# EAGLE board FULLMONI-WIDE_MAIN-Board_PCB (EAGLE 9.7.0), part 1 of 3
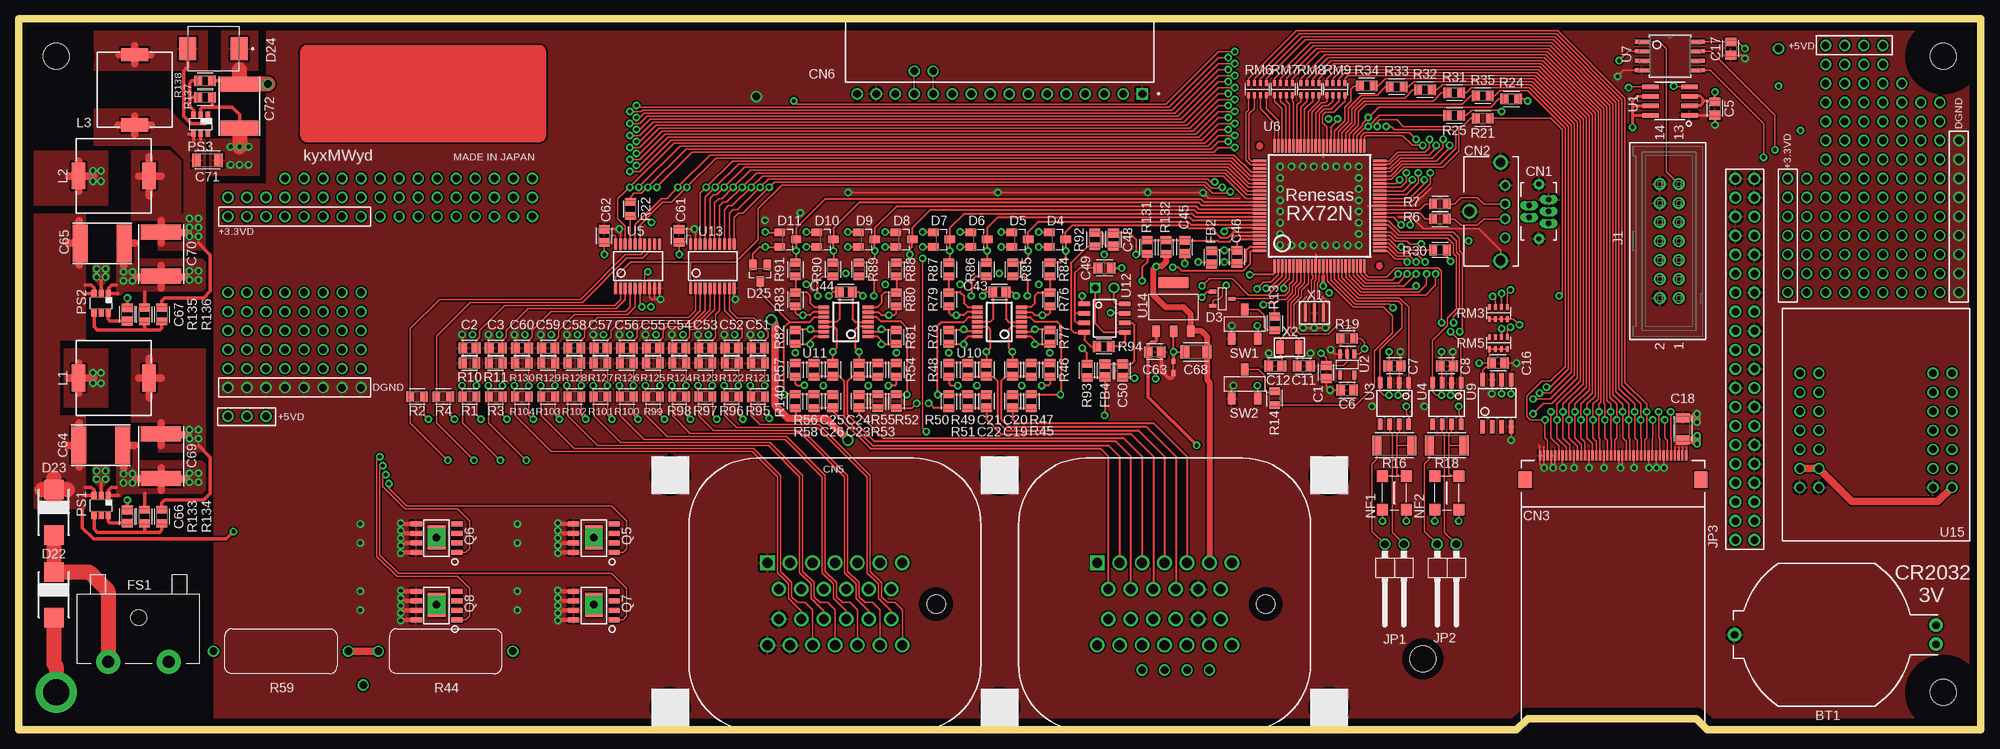
[diagram p0: board, top side]
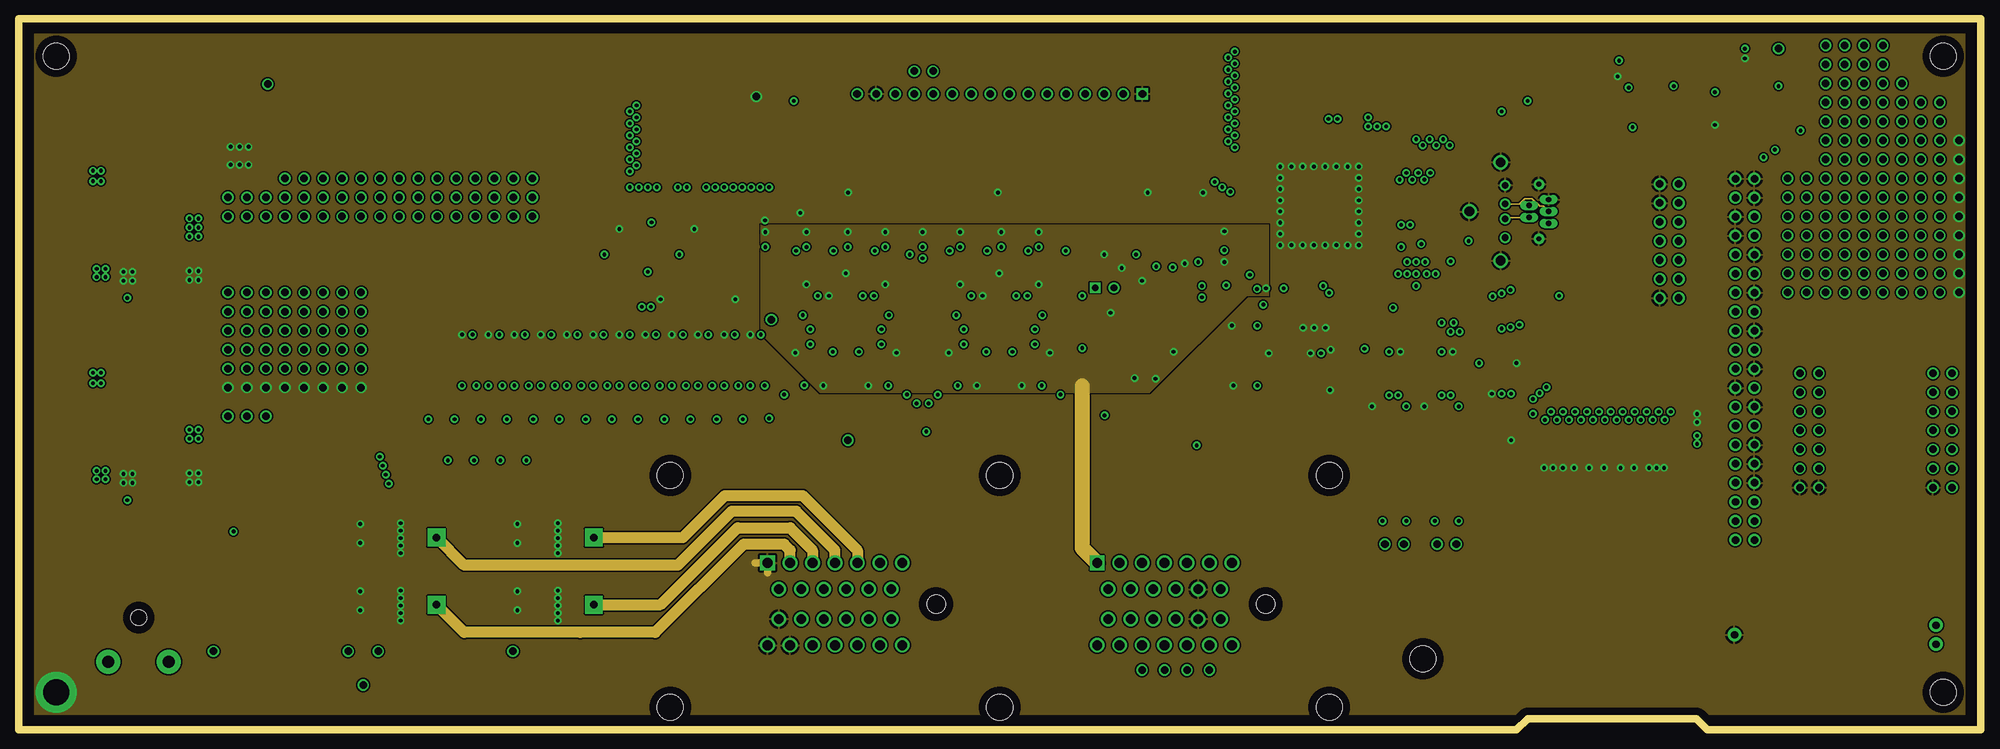
[diagram p1: board, inner layer Route2]
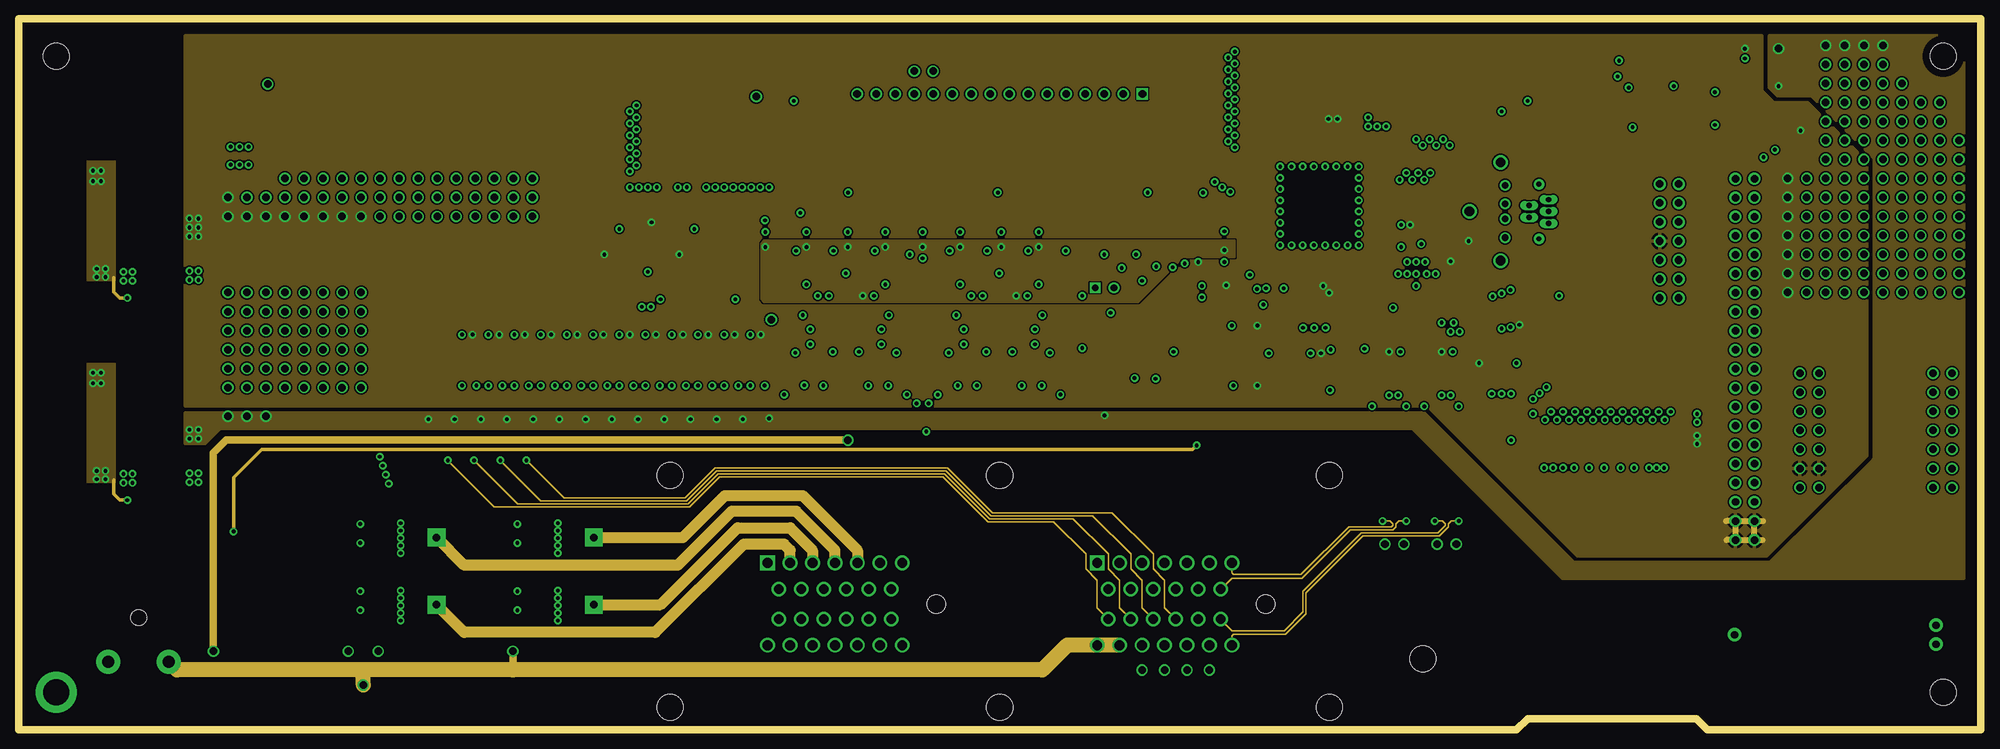
[diagram p2: board, inner layer Route15]
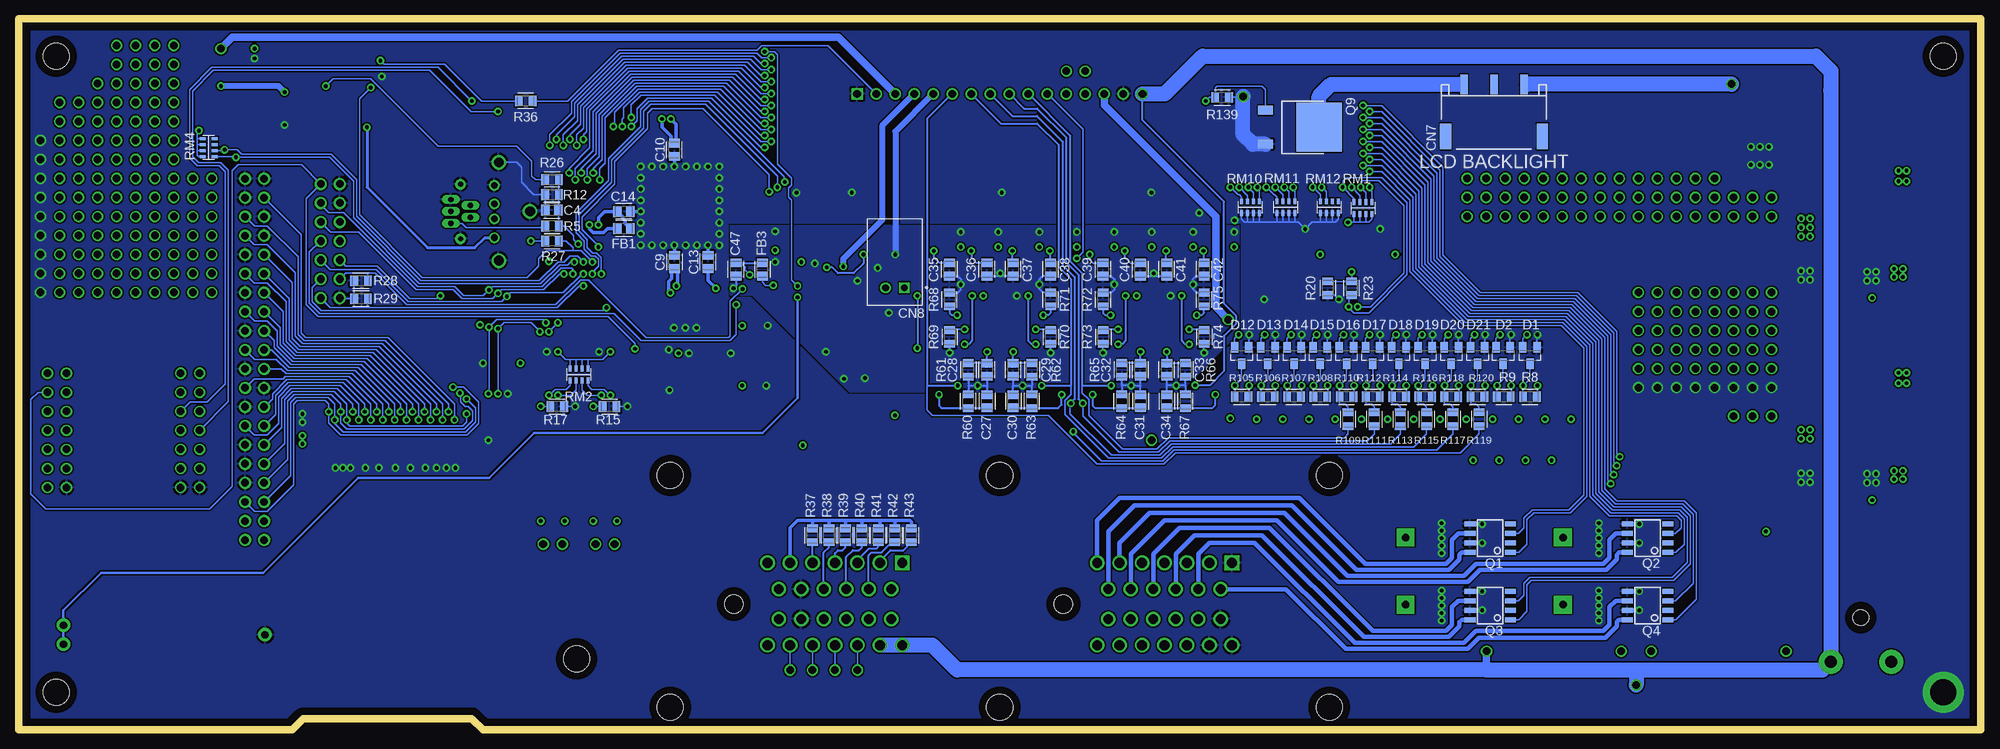
[diagram p3: board, bottom side, seen from below]

Size 262 x 95 mm. Coordinates in mm from the lower left corner, seen from the top.
Outline: 0,0 200,0 201.5,1.5 224,1.5 225.5,0 262,0 262,95 0,95 0,0
Copper layers (1+2*15+16): Top 0.035mm / dielectric 1.5mm / Route2 0.035mm / dielectric 0.15mm / Route15 0.035mm / dielectric 0.2mm / Bottom 0.035mm
Design rules "Fusion Electronics Design Rules *": minimum track width 0.2mm, minimum drill 0.5mm, track to track 0.2mm, track to pad 0.2mm, pad to pad 0.2mm, via to via 0.2mm, smd to smd 0.2mm, copper to edge 1mm, drill to drill 0.2mm, minimum pad ring 10mil, minimum via ring 0.1mm, stop-mask expansion 0.1mm, vias tented up to drill 0.51mm, thermal gap 0.3mm
Holes 3.5 mm at 257,5 257,90 131,3 5,90 131,34 87,34 175,34 87,3 175,3 187.5,9.5
tRestrict: area 0,85 to 10,95; area 252,85 to 262,95; area 252,0 to 262,10; area 84.5,31.5 to 89.5,36.5; area 128.5,31.5 to 133.5,36.5; area 128.5,0.5 to 133.5,5.5; area 172.5,31.5 to 177.5,36.5; area 172.5,0.5 to 177.5,5.5; area 84.5,0.5 to 89.5,5.5

## Footprints (pad centres in the part's own frame; a part is rotated, then mirrored left to right if it is on the bottom)
D-AGND = smd 0.7 x 0.5: 1 0,0; 2 1.5,0
120591-1 = drill 0.97 pad 1.8: 1 12.29,0; 2 -14.63,1.27; 3 -14.63,-1.27
CAPC2012X110 = smd 1.165 x 1.465: 1 -0.875,0; 2 0.875,0
CAPC3216X135 = smd 1.165 x 1.815: 1 -1.475,0; 2 1.475,0
CKG57NX5R1H226M500JH = smd 2 x 5: P$1 0,0; P$2 5.9,0
KCM55QR71E226KH01K = smd 2 x 5.4: P$1 0,0; P$2 5.9,0
500075-1517 = drill 0.7 pad 0.85 long: 1 -1.6,-1.3; 2 -0.8,1.3; 3 0,-1.3; 4 0.8,1.3; 5 1.6,-1.3 | drill 0.65 pad 1.4 slot 2.4 rotated 90: 6 -3.65,0; 7 3.65,0
105057-0001 = drill 0.9 pad 1.3: 1 0,3.5; 2 0,1; 3 0,-1; 4 0,-3.5 | drill 1.3 pad 1.9 slot 2.3: F1 0.6,6.57; F3 0.6,-6.57 | drill 1.3 pad 1.9 slot 2.3 rotated 90: F2 4.78,0
FH12A-40S-0.5SH = smd 0.3 x 1.3: 1 -9.75,0.65; 2 -9.25,0.65; 3 -8.75,0.65; 4 -8.25,0.65; 5 -7.75,0.65; 6 -7.25,0.65; 7 -6.75,0.65; 8 -6.25,0.65; 9 -5.75,0.65; 10 -5.25,0.65; 11 -4.75,0.65; 12 -4.25,0.65; 13 -3.75,0.65; 14 -3.25,0.65; 15 -2.75,0.65; 16 -2.25,0.65; 17 -1.75,0.65; 18 -1.25,0.65; 19 -0.75,0.65; 20 -0.25,0.65; 21 0.25,0.65; 22 0.75,0.65; 23 1.25,0.65; 24 1.75,0.65; 25 2.25,0.65; 26 2.75,0.65; 27 3.25,0.65; 28 3.75,0.65; 29 4.25,0.65; 30 4.75,0.65; 31 5.25,0.65; 32 5.75,0.65; 33 6.25,0.65; 34 6.75,0.65; 35 7.25,0.65; 36 7.75,0.65; 37 8.25,0.65; 38 8.75,0.65; 39 9.25,0.65; 40 9.75,0.65 | smd 1.8 x 2.2: 41 -11.715,-2.6; 42 11.715,-2.6
TE_6437288-6 = drill 1.3 square: 1 -9,5.5 | drill 1.3: 2 -6,5.5; 3 -3,5.5; 4 0,5.5; 5 3,5.5; 6 6,5.5; 7 9,5.5; 8 -7.5,2; 9 -4.5,2; 10 -1.5,2; 11 1.5,2; 12 4.5,2; 13 7.5,2; 14 -7.5,-2; 15 -4.5,-2; 16 -1.5,-2; 17 1.5,-2; 18 4.5,-2; 19 7.5,-2; 20 -9,-5.5; 21 -6,-5.5; 22 -3,-5.5; 23 0,-5.5; 24 3,-5.5; 25 6,-5.5; 26 9,-5.5 | hole 2.5: 13.5,0
TE_6473418-2 = drill 1.3 square: 1 -9,5.5 | drill 1.3: 2 -6,5.5; 3 -3,5.5; 4 0,5.5; 5 3,5.5; 6 6,5.5; 7 9,5.5; 8 -7.5,2; 9 -4.5,2; 10 -1.5,2; 11 1.5,2; 12 4.5,2; 13 7.5,2; 14 -7.5,-2; 15 -4.5,-2; 16 -1.5,-2; 17 1.5,-2; 18 4.5,-2; 19 7.5,-2; 20 -9,-5.5; 21 -6,-5.5; 22 -3,-5.5; 23 0,-5.5; 24 3,-5.5; 25 6,-5.5; 26 9,-5.5 | hole 2.5: 13.5,0
SAMTEC_SSQ-116-02-G-S-RA = drill 1.02 pad 1.37 square: 01 19.05,-5.775 | drill 1.02 pad 1.37: 02 16.51,-5.775; 03 13.97,-5.775; 04 11.43,-5.775; 05 8.89,-5.775; 06 6.35,-5.775; 07 3.81,-5.775; 08 1.27,-5.775; 09 -1.27,-5.775; 10 -3.81,-5.775; 11 -6.35,-5.775; 12 -8.89,-5.775; 13 -11.43,-5.775; 14 -13.97,-5.775; 15 -16.51,-5.775; 16 -19.05,-5.775
SM03-4.0-B-BHS-1-TB = smd 2.6 x 1: 1 8.65,4; 2 8.65,0; 3 8.65,-4 | smd 3.4 x 1.5: 4 1.7,6.45; 5 1.7,-6.45
HDR-02/RA = drill 0.9 square: 1 -1.25,0 | drill 0.9: 2 1.25,0
SOT23 = smd 1 x 1.4: 1 -0.95,-1.1; 2 0.95,-1.1; 3 0,1.1
1SS321 = smd 1 x 0.5: 1 -1.25,0.95; 2 -1.25,-0.95; 3 1.25,0
DAM3MA27 = smd 2.6 x 2.6: P$1 0,0; P$2 6.1,0
D3FS6 = smd 2.6 x 2.6: P$1 0,0; P$2 6.1,0
DIOM6859X262N = smd 2.29 x 3.12: A 3.43,0; C -3.43,0
BEADC2012X105N = smd 1.165 x 1.465: 1 -0.875,0; 2 0.875,0
SA-2020-H = drill 1.6 pad 3.2: 1 -4.05,-5.92; 2 4.05,-5.92 | hole 2.15: 0,0
SAMTEC-TST-107-01-X-D = drill 1.02 pad 1.62: 1 -7.62,-1.46; 2 -7.62,1.08; 3 -5.08,-1.46; 4 -5.08,1.08; 5 -2.54,-1.46; 6 -2.54,1.08; 7 0,-1.46; 8 0,1.08; 9 2.54,-1.46; 10 2.54,1.08; 11 5.08,-1.46; 12 5.08,1.08; 13 7.62,-1.46; 14 7.62,1.08
1X02/90 = drill 1.016 pad 1.5: 1 -1.27,-3.81; 2 1.27,-3.81
2X20 = drill 1 pad 1.6: 1 -24.13,-1.27; 2 -24.13,1.27; 3 -21.59,-1.27; 4 -21.59,1.27; 5 -19.05,-1.27; 6 -19.05,1.27; 7 -16.51,-1.27; 8 -16.51,1.27; 9 -13.97,-1.27; 10 -13.97,1.27; 11 -11.43,-1.27; 12 -11.43,1.27; 13 -8.89,-1.27; 14 -8.89,1.27; 15 -6.35,-1.27; 16 -6.35,1.27; 17 -3.81,-1.27; 18 -3.81,1.27; 19 -1.27,-1.27; 20 -1.27,1.27; 21 1.27,-1.27; 22 1.27,1.27; 23 3.81,-1.27; 24 3.81,1.27; 25 6.35,-1.27; 26 6.35,1.27; 27 8.89,-1.27; 28 8.89,1.27; 29 11.43,-1.27; 30 11.43,1.27; 31 13.97,-1.27; 32 13.97,1.27; 33 16.51,-1.27; 34 16.51,1.27; 35 19.05,-1.27; 36 19.05,1.27; 37 21.59,-1.27; 38 21.59,1.27; 39 24.13,-1.27; 40 24.13,1.27
MSS1048-103MLB = smd 1.78 x 3.56: P$1 0,0; P$2 9.4,0
ACT45B-510-2P = smd 1.5 x 1.5: 1 0,0; 2 0,-3.2; 3 4.5,-3.2; 4 4.5,0
DBV_R-PDSO-G6 = smd 0.69 x 0.99: 1 -0.95,-1.29; 2 0,-1.29; 3 0.95,-1.29; 4 0.95,1.3; 5 0,1.3; 6 -0.95,1.3
TSOT23-6_DDC = smd 0.6 x 0.8: 1 -0.95,-1.25; 2 0,-1.25; 3 0.95,-1.25; 4 0.95,1.25; 5 0,1.25; 6 -0.95,1.25
BM2LE250FJ-C = smd 1.5 x 0.635: 1 0,0; 2 0,-1.27; 3 0,-2.54; 4 0,-3.81; 5 5.4,-3.81; 6 5.4,-2.54; 7 5.4,-1.27; 8 5.4,0
BV1LE080EFJ-C = smd 1.5 x 0.635: 1 0,0; 2 0,-1.27; 3 0,-2.54; 4 0,-3.81; 5 5.4,-3.81; 6 5.4,-2.54; 7 5.4,-1.27; 8 5.4,0 | drill 1 pad 2.4 square: 9 2.7,-2 | smd 2.4 x 0.4: P$1 2.7,-0.6; P$2 2.7,-3.4
RJF0604JPD = smd 1.2 x 2: 1 -2.29,-2.2; 3 2.29,-2.2 | smd 6.5 x 6.1: 4 0,4.95
RESC2012X65 = smd 1.031 x 1.42: 1 -0.919,0; 2 0.919,0
RESC5025X71 = smd 1.231 x 2.67: 1 -2.32,0; 2 2.32,0
RLF3SJ = drill 1: 1 -9,0; 2 9,0
CN1J4TTD000J = smd 0.8 x 0.4: P$1 0,0; P$2 0,-0.8; P$3 0,-1.6; P$4 0,-2.4; P$5 1.6,-2.4; P$6 1.6,-1.6; P$7 1.6,-0.8; P$8 1.6,0
CJS-1200B = smd 1 x 1.6: 1 -1.75,-1.95; 2 0,1.95; 3 1.75,-1.95
ISL61861BIBZ = smd 2.2 x 0.6: 1 -2.6,1.905; 2 -2.6,0.635; 3 -2.6,-0.635; 4 -2.6,-1.905; 5 2.6,-1.905; 6 2.6,-0.635; 7 2.6,0.635; 8 2.6,1.905
BD5230G-1 = smd 1.2 x 0.5: 1 -1.4,0.95; 2 -1.4,0; 3 -1.4,-0.95; 4 1.4,-0.95; 5 1.4,0.95
SO-8 = smd 1.524 x 0.61: 1 -2.743,1.905; 2 -2.743,0.635; 3 -2.743,-0.635; 4 -2.743,-1.905; 5 2.743,-1.905; 6 2.743,-0.635; 7 2.743,0.635; 8 2.743,1.905
74VHCV54XFT = smd 1.5 x 0.4: 1 0,0; 2 0,-0.65; 3 0,-1.3; 4 0,-1.95; 5 0,-2.6; 6 0,-3.25; 7 0,-3.9; 8 0,-4.55; 9 0,-5.2; 10 0,-5.85; 11 5.9,-5.85; 12 5.9,-5.2; 13 5.9,-4.55; 14 5.9,-3.9; 15 5.9,-3.25; 16 5.9,-2.6; 17 5.9,-1.95; 18 5.9,-1.3; 19 5.9,-0.65; 20 5.9,0
R5F572NNXXFP = smd 0.3 x 1.8: 1 0,0; 2 0.5,0; 3 1,0; 4 1.5,0; 5 2,0; 6 2.5,0; 7 3,0; 8 3.5,0; 9 4,0; 10 4.5,0; 11 5,0; 12 5.5,0; 13 6,0; 14 6.5,0; 15 7,0; 16 7.5,0; 17 8,0; 18 8.5,0; 19 9,0; 20 9.5,0; 21 10,0; 22 10.5,0; 23 11,0; 24 11.5,0; 25 12,0; 51 12,16; 52 11.5,16; 53 11,16; 54 10.5,16; 55 10,16; 56 9.5,16; 57 9,16; 58 8.5,16; 59 8,16; 60 7.5,16; 61 7,16; 62 6.5,16; 63 6,16; 64 5.5,16; 65 5,16; 66 4.5,16; 67 4,16; 68 3.5,16; 69 3,16; 70 2.5,16; 71 2,16; 72 1.5,16; 73 1,16; 74 0.5,16; 75 0,16 | smd 1.8 x 0.3: 26 14,2; 27 14,2.5; 28 14,3; 29 14,3.5; 30 14,4; 31 14,4.5; 32 14,5; 33 14,5.5; 34 14,6; 35 14,6.5; 36 14,7; 37 14,7.5; 38 14,8; 39 14,8.5; 40 14,9; 41 14,9.5; 42 14,10; 43 14,10.5; 44 14,11; 45 14,11.5; 46 14,12; 47 14,12.5; 48 14,13; 49 14,13.5; 50 14,14; 76 -2,14; 77 -2,13.5; 78 -2,13; 79 -2,12.5; 80 -2,12; 81 -2,11.5; 82 -2,11; 83 -2,10.5; 84 -2,10; 85 -2,9.5; 86 -2,9; 87 -2,8.5; 88 -2,8; 89 -2,7.5; 90 -2,7; 91 -2,6.5; 92 -2,6; 93 -2,5.5; 94 -2,5; 95 -2,4.5; 96 -2,4; 97 -2,3.5; 98 -2,3; 99 -2,2.5; 100 -2,2
8S2_ATM-M = smd 1.864 x 0.533: 1 -3.746,1.905; 2 -3.746,0.635; 3 -3.746,-0.635; 4 -3.746,-1.905; 5 3.746,-1.905; 6 3.746,-0.635; 7 3.746,0.635; 8 3.746,1.905
BR24A16F-WLB = smd 1.8 x 0.6: 1 0,0; 2 0,-1.27; 3 0,-2.54; 4 0,-3.81; 5 6.3,-3.81; 6 6.3,-2.54; 7 6.3,-1.27; 8 6.3,0
MCP6024-I/ST = smd 1.45 x 0.45: 1 -2.95,1.95; 2 -2.95,1.3; 3 -2.95,0.65; 4 -2.95,0; 5 -2.95,-0.65; 6 -2.95,-1.3; 7 -2.95,-1.95; 8 2.95,-1.95; 9 2.95,-1.3; 10 2.95,-0.65; 11 2.95,0; 12 2.95,0.65; 13 2.95,1.3; 14 2.95,1.95
LM4818MX = smd 1.55 x 0.6: 1 -2.7,1.905; 2 -2.7,0.635; 3 -2.7,-0.635; 4 -2.7,-1.905; 5 2.7,-1.905; 6 2.7,-0.635; 7 2.7,0.635; 8 2.7,1.905
MIC2954-02WS = smd 1 x 1.5: 1 -2.3,0.75; 2 0,0.75; 3 2.3,0.75 | smd 4 x 1.5: N.C. 0,7.25
BT-RL-01 = drill 1 pad 1.5: 1 7.62,7.62; 2 10.16,7.62; 3 7.62,5.08; 4 10.16,5.08; 5 7.62,2.54; 6 10.16,2.54; 7 7.62,0; 8 10.16,0; 9 7.62,-2.54; 10 10.16,-2.54; 11 7.62,-5.08; 12 10.16,-5.08; 13 7.62,-7.62; 14 10.16,-7.62; 15 -7.62,-7.62; 16 -10.16,-7.62; 17 -7.62,-5.08; 18 -10.16,-5.08; 19 -7.62,-2.54; 20 -10.16,-2.54; 21 -7.62,0; 22 -10.16,0; 23 -7.62,2.54; 24 -10.16,2.54; 25 -7.62,5.08; 26 -10.16,5.08; 27 -7.62,7.62; 28 -10.16,7.62
CSTNE24M0VH3C000 = smd 2.5 x 0.4: 1 0,1.2; 2 0,0; 3 0,-1.2
FC-135 = smd 1.8 x 1: 1 0,1.25; 2 0,-1.25

## Placement (x,y rotation side)
$4_490_$_2024-03-09_15-35-59  D-AGND  [D-AGND]  154.2,47.7 90 top
BT1  120591-1  [120591-1]  241.4,12.7 180 top
C1  SC2012-104  [CAPC2012X110]  174.6,47.8 270 top
C2  SC2012-104  [CAPC2012X110]  60.2,51 180 top
C3  SC2012-104  [CAPC2012X110]  63.7,51 180 top
C4  SC2012-105  [CAPC2012X110]  190.8,69.4 180 bottom
C5  SC2012-104  [CAPC2012X110]  226.5,83 270 top
C6  SC2012-104  [CAPC2012X110]  177.4,45.4 180 top
C7  SC2012-104  [CAPC2012X110]  183.7,48.6 0 top
C8  SC2012-104  [CAPC2012X110]  190.7,48.6 0 top
C9  SC2012-104  [CAPC2012X110]  174.45,62.5 90 bottom
C10  SC2012-104  [CAPC2012X110]  174.45,77.5 270 bottom
C11  SC2012-7.5p  [CAPC2012X110]  171.6,48.6 180 top
C12  SC2012-7.5p  [CAPC2012X110]  167.8,48.6 0 top
C13  SC2012-104  [CAPC2012X110]  169.95,62.5 270 bottom
C14  SC2012-104  [CAPC2012X110]  181.2,69.25 0 bottom
C16  SC2012-104  [CAPC2012X110]  197.55,49 0 top
C17  SC2012-104  [CAPC2012X110]  228.61,91 270 top
C18  SC3216-106  [CAPC3216X135]  222.21,40.2 90 top
C19  SC2012-N.C  [CAPC2012X110]  132.7,43.9 90 top
C20  SC2012-N.C  [CAPC2012X110]  132.7,48.1 90 top
C21  SC2012-N.C  [CAPC2012X110]  129.2,48.1 90 top
C22  SC2012-N.C  [CAPC2012X110]  129.2,43.9 90 top
C23  SC2012-N.C  [CAPC2012X110]  112.2,43.9 90 top
C24  SC2012-N.C  [CAPC2012X110]  112.2,48.1 90 top
C25  SC2012-N.C  [CAPC2012X110]  108.7,48.1 90 top
C26  SC2012-N.C  [CAPC2012X110]  108.7,43.9 90 top
C27  SC2012-104  [CAPC2012X110]  132.7,43.9 90 bottom
C28  SC2012-104  [CAPC2012X110]  132.7,48.1 270 bottom
C29  SC2012-104  [CAPC2012X110]  129.2,48.1 270 bottom
C30  SC2012-104  [CAPC2012X110]  129.2,43.9 90 bottom
C31  SC2012-104  [CAPC2012X110]  112.2,43.9 90 bottom
C32  SC2012-104  [CAPC2012X110]  112.2,48.1 270 bottom
C33  SC2012-104  [CAPC2012X110]  108.7,48.1 270 bottom
C34  SC2012-104  [CAPC2012X110]  108.7,43.9 90 bottom
C35  SC2012-104  [CAPC2012X110]  137.7,61.5 270 bottom
C36  SC2012-104  [CAPC2012X110]  132.7,61.5 270 bottom
C37  SC2012-104  [CAPC2012X110]  129.2,61.5 270 bottom
C38  SC2012-104  [CAPC2012X110]  124.2,61.5 270 bottom
C39  SC2012-104  [CAPC2012X110]  117.2,61.5 270 bottom
C40  SC2012-104  [CAPC2012X110]  112.2,61.5 270 bottom
C41  SC2012-104  [CAPC2012X110]  108.7,61.5 270 bottom
C42  SC2012-104  [CAPC2012X110]  103.7,61.5 270 bottom
C43  SC2012-104  [CAPC2012X110]  130.95,58.5 180 top
C44  SC2012-104  [CAPC2012X110]  110.45,58.5 180 top
C45  SC2012-104  [CAPC2012X110]  155.7,64.5 270 top
C46  SC2012-104  [CAPC2012X110]  162.7,63.2 270 top
C47  SC2012-104  [CAPC2012X110]  166.2,61.5 270 bottom
C48  SC2012-394  [CAPC2012X110]  146.2,65.5 270 top
C49  SC2012-105  [CAPC2012X110]  145,61.7 0 top
C50  SC2012-104  [CAPC2012X110]  147.42,48 270 top
C51  SC2012-102  [CAPC2012X110]  98.7,51 180 top
C52  SC2012-102  [CAPC2012X110]  95.2,51 180 top
C53  SC2012-102  [CAPC2012X110]  91.7,51 180 top
C54  SC2012-102  [CAPC2012X110]  88.2,51 180 top
C55  SC2012-102  [CAPC2012X110]  84.7,51 180 top
C56  SC2012-102  [CAPC2012X110]  81.2,51 180 top
C57  SC2012-102  [CAPC2012X110]  77.7,51 180 top
C58  SC2012-102  [CAPC2012X110]  74.2,51 180 top
C59  SC2012-102  [CAPC2012X110]  70.7,51 180 top
C60  SC2012-102  [CAPC2012X110]  67.2,51 180 top
C61  SC2012-104  [CAPC2012X110]  88.2,66 270 top
C62  SC2012-104  [CAPC2012X110]  78.2,66 270 top
C63  SC2012-104  [CAPC2012X110]  151.7,50.5 0 top
C64  CKG57NX5R1H226M500JH  [CKG57NX5R1H226M500JH]  8,38 0 top
C65  CKG57NX5R1H226M500JH  [CKG57NX5R1H226M500JH]  8.2,65 0 top
C66  C0805C104M5RACTU  [CAPC2012X110]  14.5,28.5 270 top
C67  C0805C104M5RACTU  [CAPC2012X110]  14.5,55.5 270 top
C68  SC3216-106  [CAPC3216X135]  157.2,50.5 180 top
C69  KCM55WR7YA336MH01K  [KCM55QR71E226KH01K]  19,39.5 270 top
C70  KCM55QR71E226KH01K  [KCM55QR71E226KH01K]  19,66.5 270 top
C71  SC3216-106  [CAPC3216X135]  25.2,76.1 0 top
C72  CKG57NX5R1H226M500JH  [CKG57NX5R1H226M500JH]  29.5,80.36 90 top
CN1  500075-1517  [500075-1517]  203,69.25 90 top
CN2  105057-0001  [105057-0001]  198.5,69.25 180 top
CN3  FH12A-40S-0.5SH  [FH12A-40S-0.5SH]  212.9,36 0 top
CN4  6437288-6  [TE_6437288-6]  153,16.8 0 top
CN5  6473418-2  [TE_6473418-2]  109,16.8 0 top
CN6  SSQ-116-02-G-S-RA  [SAMTEC_SSQ-116-02-G-S-RA]  131,90.75 0 top
CN7  SM03-4.0-B-BHS-1-TB  [SM03-4.0-B-BHS-1-TB]  65,77.6 90 bottom
CN8  S2B-XH-A(LF)(SN)  [HDR-02/RA]  145,59.06 180 bottom
D1  BAT54S  [SOT23]  60.2,50 180 bottom
D2  BAT54S  [SOT23]  63.8,50 180 bottom
D3  1SS321  [1SS321]  160.7,57.6 0 top
D4  BAT54S  [SOT23]  138.7,65.5 270 top
D5  BAT54S  [SOT23]  133.7,65.5 270 top
D6  BAT54S  [SOT23]  128.2,65.5 270 top
D7  BAT54S  [SOT23]  123.2,65.5 270 top
D8  BAT54S  [SOT23]  118.2,65.5 270 top
D9  BAT54S  [SOT23]  113.2,65.5 270 top
D10  BAT54S  [SOT23]  107.7,65.5 270 top
D11  BAT54S  [SOT23]  102.7,65.5 270 top
D12  BAT54S  [SOT23]  98.7,50 180 bottom
D13  BAT54S  [SOT23]  95.2,50 180 bottom
D14  BAT54S  [SOT23]  91.7,50 180 bottom
D15  BAT54S  [SOT23]  88.2,50 180 bottom
D16  BAT54S  [SOT23]  84.7,50 180 bottom
D17  BAT54S  [SOT23]  81.2,50 180 bottom
D18  BAT54S  [SOT23]  77.7,50 180 bottom
D19  BAT54S  [SOT23]  74.2,50 180 bottom
D20  BAT54S  [SOT23]  70.7,50 180 bottom
D21  BAT54S  [SOT23]  67.2,50 180 bottom
D22  DAM3MA27  [DAM3MA27]  4.7,15 90 top
D23  D3FS6  [D3FS6]  4.7,26 90 top
D24  SS34  [DIOM6859X262N]  26,91 180 top
D25  BAT54S  [SOT23]  99,61 180 top
FB1  BLM21PG331  [BEADC2012X105N]  181.2,66.95 0 bottom
FB2  BLM21PG331  [BEADC2012X105N]  159.3,63.1 90 top
FB3  BLM21PG331  [BEADC2012X105N]  162.7,61.5 90 bottom
FB4  BLM21PG331  [BEADC2012X105N]  145.04,48 90 top
FS1  SA-2020-H  [SA-2020-H]  16,15 0 top
J1  TST-107-01-T-D  [SAMTEC-TST-107-01-X-D]  220.2,65.3 90 top
JP1  [1X02/90]  183.7,21 180 top
JP2  [1X02/90]  190.7,21 180 top
JP3  [2X20]  230.5,49.5 270 top
L1  7443251600  [MSS1048-103MLB]  8,47 0 top
L2  MSS1048-103MLB  [MSS1048-103MLB]  8,74 0 top
L3  MSS1048-103MLB  [MSS1048-103MLB]  15.5,80.8 90 top
NF1  B82787C0513H002  [ACT45B-510-2P]  182.1,29.4 90 top
NF2  B82787C0513H002  [ACT45B-510-2P]  189.1,29.4 90 top
PS1  TPS54308DDCR  [DBV_R-PDSO-G6]  11,30 180 top
PS2  TPS54308DDCR  [DBV_R-PDSO-G6]  11,57 180 top
PS3  SDB628  [TSOT23-6_DDC]  24.3,80.9 180 top
Q1  BM2LE250FJ-C  [BM2LE250FJ-C]  62.8,23.7 180 bottom
Q2  BM2LE250FJ-C  [BM2LE250FJ-C]  41.8,23.7 180 bottom
Q3  BM2LE250FJ-C  [BM2LE250FJ-C]  62.8,14.7 180 bottom
Q4  BM2LE250FJ-C  [BM2LE250FJ-C]  41.8,14.7 180 bottom
Q5  BV1LE080EFJ-C  [BV1LE080EFJ-C]  79.5,23.7 180 top
Q6  BV1LE080EFJ-C  [BV1LE080EFJ-C]  58.5,23.7 180 top
Q7  BV1LE080EFJ-C  [BV1LE080EFJ-C]  79.5,14.7 180 top
Q8  BV1LE080EFJ-C  [BV1LE080EFJ-C]  58.5,14.7 180 top
Q9  2SK4033  [RJF0604JPD]  93.3,80.5 270 bottom
R1  SR2012-N.C  [RESC2012X65]  60.2,44.5 0 top
R2  SR2012-N.C  [RESC2012X65]  53.2,44.5 0 top
R3  SR2012-N.C  [RESC2012X65]  63.7,44.5 0 top
R4  SR2012-N.C  [RESC2012X65]  56.7,44.5 0 top
R5  SR2012-152(Peri)/N.C(Host)  [RESC2012X65]  190.8,67.3 0 bottom
R6  SR2012-100  [RESC2012X65]  189.8,68.25 180 top
R7  SR2012-100  [RESC2012X65]  189.8,70.25 180 top
R8  SR2012-N.C  [RESC2012X65]  60.2,44.5 180 bottom
R9  SR2012-N.C  [RESC2012X65]  63.7,44.5 180 bottom
R10  SR2012-103  [RESC2012X65]  60.2,49 0 top
R11  SR2012-103  [RESC2012X65]  63.7,49 0 top
R12  SR2012-302(Peri)/N.C(Host)  [RESC2012X65]  190.8,71.5 0 bottom
R13  SR2012-472  [RESC2012X65]  167.7,54.3 90 top
R14  SR2012-103  [RESC2012X65]  167.7,44.3 270 top
R15  SR2012-0  [RESC2012X65]  183.1,43.2 180 bottom
R16  3502120RFT  [RESC5025X71]  183.7,38 0 top
R17  SR2012-0  [RESC2012X65]  190.1,43.2 180 bottom
R18  3502120RFT  [RESC5025X71]  190.7,38 0 top
R19  SR2012-472  [RESC2012X65]  177.4,52.3 180 top
R20  SR2012-103  [RESC2012X65]  87.2,59 90 bottom
R21  SR2012-N.C  [RESC2012X65]  195.5,81.7 180 top
R22  SR2012-N.C  [RESC2012X65]  81.7,69.6 90 top
R23  SR2012-N.C  [RESC2012X65]  84,59 270 bottom
R24  SR2012-0  [RESC2012X65]  199.3,84.3 180 top
R25  SR2012-0  [RESC2012X65]  191.7,82.1 180 top
R26  SR2012-N.C(Peri)/0(Host)  [RESC2012X65]  190.8,73.5 0 bottom
R27  SR2012-103  [RESC2012X65]  190.8,65.3 180 bottom
R28  SR2012-103  [RESC2012X65]  216.3,57.6 0 bottom
R29  SR2012-103  [RESC2012X65]  216.3,60 0 bottom
R30  SR2012-472  [RESC2012X65]  189.8,64.1 0 top
R31  SR2012-N.C  [RESC2012X65]  191.7,85.1 0 top
R32  SR2012-N.C  [RESC2012X65]  187.8,85.5 0 top
R33  SR2012-470  [RESC2012X65]  184,85.9 0 top
R34  SR2012-N.C  [RESC2012X65]  180,86 0 top
R35  SR2012-220  [RESC2012X65]  195.5,84.7 0 top
R36  SR2012-100  [RESC2012X65]  194.3,84 0 bottom
R37  SR2012-N.C  [RESC2012X65]  156,26 270 bottom
R38  SR2012-N.C  [RESC2012X65]  153.8,26 270 bottom
R39  SR2012-N.C  [RESC2012X65]  151.6,26 270 bottom
R40  SR2012-N.C  [RESC2012X65]  149.4,26 270 bottom
R41  SR2012-N.C  [RESC2012X65]  147.2,26 270 bottom
R42  SR2012-N.C  [RESC2012X65]  145,26 270 bottom
R43  SR2012-N.C  [RESC2012X65]  142.8,26 270 bottom
R44  RLF3SJ0.1Ω  [RLF3SJ]  57,10.5 180 top
R45  SR2012-123D  [RESC2012X65]  135.2,43.9 90 top
R46  SR2012-123D  [RESC2012X65]  137.7,48.1 90 top
R47  SR2012-N.C  [RESC2012X65]  135.2,48.1 90 top
R48  SR2012-123D  [RESC2012X65]  124.2,48.1 90 top
R49  SR2012-N.C  [RESC2012X65]  126.7,48.1 90 top
R50  SR2012-123D  [RESC2012X65]  124.2,43.9 90 top
R51  SR2012-N.C  [RESC2012X65]  126.7,43.9 90 top
R52  SR2012-123D  [RESC2012X65]  117.2,43.9 90 top
R53  SR2012-N.C  [RESC2012X65]  114.7,43.9 90 top
R54  SR2012-0  [RESC2012X65]  117.2,48.1 90 top
R55  SR2012-N.C  [RESC2012X65]  114.7,48.1 90 top
R56  SR2012-N.C  [RESC2012X65]  106.2,48.1 90 top
R57  SR2012-123D  [RESC2012X65]  103.7,48.1 90 top
R58  SR2012-N.C  [RESC2012X65]  106.2,43.9 90 top
R59  RLF3SJ560Ω  [RLF3SJ]  35,10.5 180 top
R60  SR2012-302D  [RESC2012X65]  135.2,43.9 270 bottom
R61  SR2012-302D  [RESC2012X65]  135.2,48.1 90 bottom
R62  SR2012-302D  [RESC2012X65]  126.7,48.1 90 bottom
R63  SR2012-302D  [RESC2012X65]  126.7,43.9 270 bottom
R64  SR2012-302D  [RESC2012X65]  114.7,43.9 270 bottom
R65  SR2012-N.C  [RESC2012X65]  114.7,48.1 90 bottom
R66  SR2012-302D  [RESC2012X65]  106.2,48.1 90 bottom
R67  SR2012-N.C  [RESC2012X65]  106.2,43.9 270 bottom
R68  SR2012-N.C  [RESC2012X65]  137.7,57.5 270 bottom
R69  SR2012-N.C  [RESC2012X65]  137.7,52.5 90 bottom
R70  SR2012-N.C  [RESC2012X65]  124.2,52.5 90 bottom
R71  SR2012-N.C  [RESC2012X65]  124.2,57.5 270 bottom
R72  SR2012-N.C  [RESC2012X65]  117.2,57.5 270 bottom
R73  SR2012-N.C  [RESC2012X65]  117.2,52.5 90 bottom
R74  SR2012-N.C  [RESC2012X65]  103.7,52.5 90 bottom
R75  SR2012-N.C  [RESC2012X65]  103.7,57.5 270 bottom
R76  SR2012-0  [RESC2012X65]  137.7,57.5 90 top
R77  SR2012-0  [RESC2012X65]  137.7,52.5 270 top
R78  SR2012-0  [RESC2012X65]  124.2,52.5 270 top
R79  SR2012-0  [RESC2012X65]  124.2,57.5 90 top
R80  SR2012-0  [RESC2012X65]  117.2,57.5 90 top
R81  SR2012-0  [RESC2012X65]  117.2,52.5 270 top
R82  SR2012-0  [RESC2012X65]  103.7,52.5 270 top
R83  SR2012-0  [RESC2012X65]  103.7,57.5 90 top
R84  SR2012-203  [RESC2012X65]  137.7,61.5 90 top
R85  SR2012-203  [RESC2012X65]  132.75,61.5 90 top
R86  SR2012-203  [RESC2012X65]  129.2,61.5 90 top
R87  SR2012-203  [RESC2012X65]  124.2,61.5 90 top
R88  SR2012-203  [RESC2012X65]  117.2,61.5 90 top
R89  SR2012-203  [RESC2012X65]  112.2,61.5 90 top
R90  SR2012-203  [RESC2012X65]  108.7,61.5 90 top
R91  SR2012-203  [RESC2012X65]  103.7,61.5 90 top
R92  SR2012-203  [RESC2012X65]  143.7,65.5 270 top
R93  SR2012-103  [RESC2012X65]  142.67,48 270 top
R94  SR2012-203  [RESC2012X65]  144.9,51.2 0 top
R95  SR2012-102  [RESC2012X65]  98.7,44.5 0 top
R96  SR2012-102  [RESC2012X65]  95.2,44.5 0 top
R97  SR2012-102  [RESC2012X65]  91.7,44.5 0 top
R98  SR2012-N.C  [RESC2012X65]  88.2,44.5 0 top
R99  SR2012-N.C  [RESC2012X65]  84.7,44.5 0 top
R100  SR2012-N.C  [RESC2012X65]  81.2,44.5 0 top
R101  SR2012-N.C  [RESC2012X65]  77.7,44.5 0 top
R102  SR2012-N.C  [RESC2012X65]  74.2,44.5 0 top
R103  SR2012-N.C  [RESC2012X65]  70.7,44.5 0 top
R104  SR2012-N.C  [RESC2012X65]  67.2,44.5 0 top
R105  SR2012-333  [RESC2012X65]  98.7,44.5 180 bottom
R106  SR2012-333  [RESC2012X65]  95.2,44.5 180 bottom
R107  SR2012-333  [RESC2012X65]  91.7,44.5 180 bottom
R108  SR2012-333  [RESC2012X65]  88.2,44.5 180 bottom
R109  SR2012-N.C  [RESC2012X65]  84.5,41.5 90 bottom
R110  SR2012-333  [RESC2012X65]  84.7,44.5 180 bottom
R111  SR2012-N.C  [RESC2012X65]  81,41.5 90 bottom
R112  SR2012-333  [RESC2012X65]  81.2,44.5 180 bottom
R113  SR2012-N.C  [RESC2012X65]  77.5,41.5 90 bottom
R114  SR2012-333  [RESC2012X65]  77.7,44.5 180 bottom
R115  SR2012-N.C  [RESC2012X65]  74,41.5 90 bottom
R116  SR2012-333  [RESC2012X65]  74.2,44.5 180 bottom
R117  SR2012-0  [RESC2012X65]  70.5,41.5 90 bottom
R118  SR2012-0  [RESC2012X65]  70.7,44.5 180 bottom
R119  SR2012-N.C  [RESC2012X65]  67,41.5 90 bottom
R120  SR2012-333  [RESC2012X65]  67.2,44.5 180 bottom
R121  SR2012-N.C  [RESC2012X65]  98.7,49 0 top
R122  SR2012-N.C  [RESC2012X65]  95.2,49 0 top
R123  SR2012-N.C  [RESC2012X65]  91.7,49 0 top
R124  SR2012-N.C  [RESC2012X65]  88.2,49 0 top
R125  SR2012-N.C  [RESC2012X65]  84.7,49 0 top
R126  SR2012-N.C  [RESC2012X65]  81.2,49 0 top
R127  SR2012-N.C  [RESC2012X65]  77.7,49 0 top
R128  SR2012-N.C  [RESC2012X65]  74.2,49 0 top
R129  SR2012-N.C  [RESC2012X65]  70.7,49 0 top
R130  SR2012-N.C  [RESC2012X65]  67.2,49 0 top
R131  SR2012-152D  [RESC2012X65]  150.7,64.5 90 top
R132  SR2012-102D  [RESC2012X65]  153.2,64.5 270 top
R133  SR2012-1372B  [RESC2012X65]  16.8,28.5 270 top
R134  SR2012-104F  [RESC2012X65]  19.1,28.5 90 top
R135  SR2012-223F  [RESC2012X65]  16.8,55.5 270 top
R136  SR2012-104F  [RESC2012X65]  19.1,55.5 90 top
R137  SR2012-5231B  [RESC2012X65]  24.9,84.5 180 top
R138  SR2012-104F  [RESC2012X65]  24.9,86.7 0 top
R139  SR2012-103  [RESC2012X65]  101.3,84.5 180 bottom
R140  SR2012-103  [RESC2012X65]  103.7,43.9 270 top
RM1  CAY16-103J4LF  [CN1J4TTD000J]  81.3,70.5 270 bottom
RM2  CAY16-103J4LF  [CN1J4TTD000J]  188.4,46.7 90 bottom
RM3  CAY16-103J4LF  [CN1J4TTD000J]  198.8,56.5 270 top
RM4  CAY16-472J4LF  [CN1J4TTD000J]  235.8,76.6 180 bottom
RM5  CAY16-472J4LF  [CN1J4TTD000J]  198.8,52.5 270 top
RM6  CAY16-470J4LF  [CN1J4TTD000J]  164.2,84.8 90 top
RM7  CAY16-470J4LF  [CN1J4TTD000J]  167.7,84.8 90 top
RM8  CAY16-470J4LF  [CN1J4TTD000J]  171.2,84.8 90 top
RM9  CAY16-470J4LF  [CN1J4TTD000J]  174.7,84.8 90 top
RM10  CAY16-103J4LF  [CN1J4TTD000J]  98.7,69 90 bottom
RM11  CAY16-103J4LF  [CN1J4TTD000J]  94,69 90 bottom
RM12  CAY16-103J4LF  [CN1J4TTD000J]  88.2,69 90 bottom
SW1  CJS-1200TB  [CJS-1200B]  163.7,54.2 0 top
SW2  CJS-1200TB  [CJS-1200B]  163.7,46.2 0 top
U1  ISL61861BIBZ  [ISL61861BIBZ]  220.5,84 180 top
U2  BD5230G-2  [BD5230G-1]  177.4,48.8 270 top
U3  SN65HVD230DR  [SO-8]  183.7,43.6 270 top
U4  SN65HVD230DR  [SO-8]  190.7,43.6 270 top
U5  74VHCV541FT  [74VHCV54XFT]  79.7,59 90 top
U6  R5F572NNXXFP  [R5F572NNXXFP]  167.7,62 0 top
U7  ATTINY85-20SU  [8S2_ATM-M]  220.5,90 0 top
U9  BR24A16F-WLB  [BR24A16F-WLB]  195.5,40.5 90 top
U10  MCP6024-I/ST  [MCP6024-I/ST]  130.95,54.5 180 top
U11  MCP6024-I/ST  [MCP6024-I/ST]  110.45,54.5 180 top
U12  LM4861M  [LM4818MX]  145,55 0 top
U13  74VHCV541FT  [74VHCV54XFT]  89.7,59 90 top
U14  MIC2954-02WS  [MIC2954-02WS]  154.2,52.5 0 top
U15  BT-RL-01  [BT-RL-01]  248,40 0 top
U$2  [FM-LOGO2]  35,78.5 0 top
X1  CSTNE24M0VH3C000  [CSTNE24M0VH3C000]  173,55.7 90 top
X2  FC-135 32.7680KA-E3  [FC-135]  169.7,51.1 90 top

## Library data of the parts
$4_490_$_2024-03-09_15-35-59 BT1 C64 C65 C69 C70 C72 CN1-CN3 CN7 D3 D22 D23 FS1 J1 JP1-JP3 L1-L3 NF1 NF2 PS1-PS3 Q1-Q9 R44 R59 RM1-RM12 SW1 SW2 U1-U6 U9-U15 U$2 X1 X2 = ECADライブラリ
C1-C14 C16-C63 C66-C68 C71 = Capacitor; CATEGORY: Capacitor
CN4 = ECADライブラリ; MANUFACTURER: TE Connectivity; PARTREV: A2; STANDARD: Manufacturer recommended
CN5 = ECADライブラリ; MANUFACTURER: TE CONNECTIVITY; PARTREV: A2; STANDARD: MANUFACTURER RECOMMENDATION
CN6 = ECADライブラリ; MANUFACTURER: Samtec; PARTREV: R; STANDARD: Manufacturer Recommendations
CN8 = Connectors; CREATED_BY: PCBLayout.com; DIGIKEY_PART_NUMBER: 455-2257-ND; MANUFACTURER: JST Sales America Inc.; MPN: S2B-XH-A(LF)(SN)
D1 D2 D4-D21 D25 = diode
D24 = ECADライブラリ; MANUFACTURER: Taiwan Semiconductor; MAXIMUM_PACKAGE_HEIGHT: 2.62 mm; PARTREV: Q2102; STANDARD: IPC-7351B
FB1-FB4 = ECADライブラリ; CATEGORY: Filter; DESCRIPTION: FERRITE BEAD 330 OHM 0805 1LN; MANUFACTURER: Murata Electronics; SUB-CATEGORY: Ferrite bead
R1-R43 R45-R58 R60-R140 = Resistor; CATEGORY: Resistor; SUB-CATEGORY: Fixed
U7 = ECADライブラリ; COPYRIGHT: Copyright (C) 2024 Ultra Librarian. All rights reserved.; MANUFACTURER_PART_NUMBER: ATTINY85-20SUR; MFR_NAME: Microchip

## Nets
+3.3VD: C1.1 C7.1 C8.1 C9.1 C10.1 C16.1 C17.1 C18.1 C61.2 C62.2 C70.P$1 C71.1 CN3.37 CN3.38 CN3.39 CN3.40 D1.2 D2.2 D3.2 D12.2 D13.2 D14.2 D15.2 D16.2 D17.2 D18.2 D19.2 D20.2 D21.2 FB1.1 FB2.1 FB3.1 J1.8 JP3.37 JP3.38 JP3.39 JP3.40 L2.P$2 L3.P$1 PS3.4 PS3.5 R19.2 R27.2 R30.2 R136.2 RM1.P$5 RM1.P$6 RM1.P$7 RM1.P$8 RM2.P$5 RM2.P$6 RM2.P$7 RM2.P$8 RM3.P$5 RM3.P$6 RM3.P$7 RM3.P$8 RM4.P$5 RM4.P$6 RM4.P$7 RM4.P$8 RM5.P$5 RM5.P$6 RM5.P$7 RM5.P$8 SW1.3 SW2.3 U2.2 U3.3 U4.3 U5.20 U6.14 U6.60 U7.8 U9.8 U13.20 U15.14 U15.17 U15.18
+5VD: C5.1 C69.P$1 CN6.03 FB4.1 L1.P$2 R1.2 R2.2 R3.2 R4.2 R93.2 R95.2 R96.2 R97.2 R98.2 R99.2 R100.2 R101.2 R102.2 R103.2 R104.2 R134.2 U1.2 U1.3
+5VREF: C68.1 CN4.6 CN6.04 R37.1 R38.1 R39.1 R40.1 R41.1 R42.1 R43.1 R132.2 U14.3
A/D0: C19.1 CN4.5 R37.2 R45.1
A/D1: C20.1 CN4.11 R38.2 R47.1
A/D2: C21.1 CN4.4 R39.2 R49.1
A/D3: C22.1 CN4.10 R40.2 R51.1
A/D4: C23.1 CN4.3 R41.2 R53.1
A/D5: C24.1 CN4.9 R42.2 R55.1
A/D6: C25.1 CN4.2 R43.2 R56.1
A/D7: C26.1 CN4.8 R58.1
AGND: $4_490_$_2024-03-09_15-35-59.2 C27.2 C28.2 C29.2 C30.2 C31.2 C32.2 C33.2 C34.2 C35.2 C36.2 C37.2 C38.2 C39.2 C40.2 C41.2 C42.2 C43.2 C44.2 C45.2 C46.2 C47.2 C49.2 C50.2 C68.2 CN4.1 CN6.05 D4.1 D5.1 D6.1 D7.1 D8.1 D9.1 D10.1 D11.1 R60.1 R61.1 R62.1 R63.1 R64.1 R65.1 R66.1 R67.1 R68.1 R69.1 R70.1 R71.1 R72.1 R73.1 R74.1 R75.1 R131.1 U6.3 U6.94 U6.99 U10.11 U11.11 U12.7 U14.2
AN0: C35.1 D4.3 R84.2 U6.95
AN1: C36.1 D5.3 R85.2 U6.93
AN2: C37.1 D6.3 R86.2 U6.92
AN3: C38.1 D7.3 R87.2 U6.91
AN4: C39.1 D8.3 R88.2 U6.90
AN5: C40.1 D9.3 R89.2 U6.89
AN6: C41.1 D10.3 R90.2 U6.88
AN7: C42.1 D11.3 R91.2 U6.87
AVCC0: C43.1 C44.1 C46.1 D4.2 D5.2 D6.2 D7.2 D8.2 D9.2 D10.2 D11.2 D25.2 FB2.2 U6.97 U10.4 U11.4
AVCC1: C47.1 FB3.2 U6.1
B1: CN3.24 JP3.24 RM7.P$8
B2: CN3.25 JP3.25 RM6.P$5
B3: CN3.27 JP3.27 RM6.P$6
B4: CN3.28 JP3.28 RM6.P$7
B5: CN3.29 JP3.29 RM6.P$8
BELTS: CN6.09 R52.1 R111.1
BREAK: CN6.07 R48.1 R115.1
CAN0-H: CN4.13 NF1.2
CAN0-L: CN4.7 NF1.1
CAN1-H: CN4.26 NF2.2
CAN1-L: CN4.19 NF2.1
CHARGE: CN6.06 R46.1 R119.1
CHECK_HEAT: CN6.08 R50.1 R113.1
CLK: CN3.3 JP3.3 R35.2
CR2032: BT1.2 BT1.3 D3.1
CRX0: RM2.P$4 U3.4 U6.17
CRX1: RM2.P$2 U4.4 U6.31
CTX0: RM2.P$3 U3.1 U6.18
CTX1: RM2.P$1 U4.1 U6.25
DA1: C48.1 U6.100
DE: CN3.35 JP3.35 R33.2
DGND: $4_490_$_2024-03-09_15-35-59.1 BT1.1 C1.2 C2.2 C3.2 C4.2 C5.2 C6.2 C7.2 C8.2 C9.2 C10.2 C11.1 C12.1 C13.1 C14.2 C16.2 C17.2 C18.2 C51.2 C52.2 C53.2 C54.2 C55.2 C56.2 C57.2 C58.2 C59.2 C60.2 C61.1 C62.1 C63.2 C64.P$2 C65.P$2 C69.P$2 C70.P$2 C71.2 C72.P$1 CN1.5 CN1.6 CN1.7 CN2.4 CN2.F1 CN2.F2 CN2.F3 CN3.1 CN3.2 CN3.4 CN3.5 CN3.7 CN3.10 CN3.14 CN3.18 CN3.22 CN3.23 CN3.26 CN3.30 CN3.32 CN3.34 CN4.12 CN4.18 CN5.1 CN5.14 CN5.20 CN5.21 CN6.01 CN6.15 D1.1 D2.1 D12.1 D13.1 D14.1 D15.1 D16.1 D17.1 D18.1 D19.1 D20.1 D21.1 D22.P$1 J1.2 J1.12 J1.14 JP3.1 JP3.2 JP3.4 JP3.5 JP3.7 JP3.10 JP3.14 JP3.18 JP3.22 JP3.23 JP3.26 JP3.30 JP3.32 JP3.34 PS1.1 PS2.1 PS3.2 Q1.5 Q1.7 Q2.5 Q2.7 Q3.5 Q3.7 Q4.5 Q4.7 Q5.5 Q5.6 Q5.7 Q5.8 Q6.5 Q6.6 Q6.7 Q6.8 Q7.5 Q7.6 Q7.7 Q7.8 Q8.5 Q8.6 Q8.7 Q8.8 Q9.3 R10.1 R11.1 R12.1 R15.1 R17.1 R20.1 R28.1 R29.1 R121.1 R122.1 R123.1 R124.1 R125.1 R126.1 R127.1 R128.1 R129.1 R130.1 R133.1 R135.1 R137.1 R139.1 RM10.P$1 RM10.P$2 RM10.P$3 RM10.P$4 RM11.P$1 RM11.P$2 RM11.P$3 RM11.P$4 RM12.P$1 RM12.P$2 RM12.P$3 RM12.P$4 SW1.1 SW2.1 U1.1 U2.3 U3.2 U4.2 U5.8 U5.9 U5.10 U5.19 U6.12 U6.38 U6.62 U7.4 U9.4 U9.7 U13.10 U13.19 U15.13 U15.15 U15.16 X1.2
DI0: CN5.26 R95.1 R105.1
DI1: CN5.19 R96.1 R106.1
DI2: CN5.25 R97.1 R107.1
DI3: CN5.18 R98.1 R108.1
DI4: CN5.24 R99.1 R110.1
DI5: CN5.17 R100.1 R112.1
DI6: CN5.23 R101.1 R114.1
DI7: CN5.16 R102.1 R116.1
DI8: CN5.22 R103.1 R118.1
DI9: CN5.15 R104.1 R120.1
DII0: RM10.P$8 U6.24 U13.11
DII1: RM10.P$7 U6.23 U13.12
DII2: RM10.P$6 U6.86 U13.13
DII3: RM10.P$5 U6.85 U13.14
DII4: RM11.P$8 U6.84 U13.15
DII5: RM11.P$7 U6.83 U13.16
DII6: RM11.P$6 U6.82 U13.17
DII7: RM11.P$5 U6.81 U13.18
DII8: RM12.P$8 U5.15 U6.80
DII9: RM12.P$7 U5.16 U6.79
DO0: Q1.3 U6.44
DO1: Q1.1 U6.43
DO1-0: CN5.7 Q1.6
DO1-1: CN5.13 Q1.8
DO1-2: CN5.6 Q2.6
DO1-3: CN5.12 Q2.8
DO1-4: CN5.11 Q3.6
DO1-5: CN5.10 Q3.8
DO1-6: CN5.9 Q4.6
DO1-7: CN5.8 Q4.8
DO2: Q2.3 U6.42
DO2-0: CN5.5 Q5.9 Q5.P$1 Q5.P$2
DO2-1: CN5.4 Q6.9 Q6.P$1 Q6.P$2
DO2-2: CN5.3 Q7.9 Q7.P$1 Q7.P$2
DO2-3: CN5.2 Q8.9 Q8.P$1 Q8.P$2
DO3: Q2.1 U6.41
DO4: Q3.3 U6.40
DO5: Q3.1 U6.39
DO6: Q4.3 U6.52
DO7: Q4.1 U6.51
DO8: Q5.1 U6.50
DO9: Q6.1 U6.49
DO10: Q7.1 U6.48
DO11: Q8.1 U6.47
EMLE: J1.4 R29.2 U6.2
EXTAL: U6.13 X1.3
FUEL.M: CN6.14 R59.2 R140.2
G0: CN3.15 JP3.15 RM8.P$6
G1: CN3.16 JP3.16 RM8.P$7
G2: CN3.17 JP3.17 RM8.P$8
G3: CN3.19 JP3.19 RM7.P$5
G4: CN3.20 JP3.20 RM7.P$6
G5: CN3.21 JP3.21 RM7.P$7
IG1: CN4.20 CN4.21 CN6.16 FS1.2 R44.1 R57.1
IG2: C63.1 C64.P$1 C65.P$1 D23.P$2 PS1.3 PS2.3 U14.1
LCD-A: C72.P$2 CN7.3 D24.C R138.2
LCD-K: CN7.1 Q9.4
LCD_B/L: Q9.1 R139.2 U6.4
LCD_CLK: R35.1 U6.55
LCD_DATA0: RM9.P$4 U6.61
LCD_DATA1: RM9.P$3 U6.63
LCD_DATA2: RM9.P$2 U6.64
LCD_DATA3: RM9.P$1 U6.65
LCD_DATA4: RM8.P$4 U6.66
LCD_DATA5: RM8.P$3 U6.67
LCD_DATA6: RM8.P$2 U6.68
LCD_DATA7: RM8.P$1 U6.69
LCD_DATA8: RM7.P$4 U6.70
LCD_DATA9: RM7.P$3 U6.71
LCD_DATA10: RM7.P$2 U6.72
LCD_DATA11: RM7.P$1 U6.73
LCD_DATA12: RM6.P$4 U6.74
LCD_DATA13: RM6.P$3 U6.75
LCD_DATA14: RM6.P$2 U6.76
LCD_DATA15: RM6.P$1 U6.77
LCD_TCON0: R31.1 U6.56
LCD_TCON1: R32.1 U6.57
LCD_TCON2: R33.1 U6.58
LCD_TCON3: R34.1 U6.59
LUMINANCE: CN6.10 R54.1 R109.1
MD: J1.7 R13.2 U6.7
N$1: CN3.6 JP3.6
N$2: NF1.3 R16.2 U3.7
N$3: NF2.3 R18.2 U4.7
N$4: D22.P$2 D23.P$1 FS1.1
N$6: C67.2 PS2.6
N$7: C66.2 PS1.6
N$8: R15.2 U3.8
N$9: JP1.1 NF1.4 U3.6
N$10: JP1.2 R16.1
N$11: JP2.2 R18.1
N$12: R68.2 R76.1 U10.6
N$13: JP2.1 NF2.4 U4.6
N$14: R17.2 U4.8
N$15: R26.1 U1.4
N$16: CN2.1 U1.6 U1.7 U1.8
N$17: R92.2 R94.1 U12.4
N$18: R20.2 R23.1 U5.7
N$19: C67.1 L2.P$1 PS2.2
N$20: C66.1 L1.P$1 PS1.2
N$21: PS2.4 R135.2 R136.1
N$22: R44.2 R59.1
N$23: PS1.4 R133.2 R134.1
N$24: C26.2 C34.1 D25.3 R58.2 R67.2 R140.1 U11.10
N$25: R22.1 U5.17
N$26: PS3.3 R137.2 R138.1
N$29: C19.2 C27.1 R45.2 R60.2 U10.5
N$30: R69.2 R77.1 U10.2
N$32: C20.2 C28.1 R46.2 R47.2 R61.2 U10.3
N$33: R70.2 R78.1 U10.13
N$35: C21.2 C29.1 R48.2 R49.2 R62.2 U10.12
N$36: R71.2 R79.1 U10.9
N$38: C22.2 C30.1 R50.2 R51.2 R63.2 U10.10
N$39: R72.2 R80.1 U11.6
N$41: C23.2 C31.1 R52.2 R53.2 R64.2 U11.5
N$42: R73.2 R81.1 U11.2
N$44: C24.2 C32.1 R54.2 R55.2 R65.2 U11.3
N$45: R74.2 R82.1 U11.13
N$47: C25.2 C33.1 R56.2 R57.2 R66.2 U11.12
N$48: R75.2 R83.1 U11.9
N$52: R76.2 R84.1 U10.7
N$54: C51.1 D12.3 R105.2 R121.2 U13.9
N$55: C53.1 D14.3 R107.2 R123.2 U13.7
N$56: C52.1 D13.3 R106.2 R122.2 U13.8
N$57: R77.2 R85.1 U10.1
N$59: R78.2 R86.1 U10.14
N$60: C60.1 D21.3 R119.2 R120.2 R130.2 U5.4
N$61: R79.2 R87.1 U10.8
N$62: R14.1 SW2.2
N$63: R80.2 R88.1 U11.7
N$64: R81.2 R89.1 U11.1
N$65: R82.2 R90.1 U11.14
N$66: R83.2 R91.1 U11.8
N$67: C54.1 D15.3 R108.2 R124.2 U13.6
N$68: C55.1 D16.3 R109.2 R110.2 R125.2 U13.5
N$69: C56.1 D17.3 R111.2 R112.2 R126.2 U13.4
N$70: C57.1 D18.3 R113.2 R114.2 R127.2 U13.3
N$71: C58.1 D19.3 R115.2 R116.2 R128.2 U13.2
N$72: C59.1 D20.3 R117.2 R118.2 R129.2 U5.5
N$73: R13.1 SW1.2
N$77: R36.1 U7.2
N$89: CN8.1 R94.2 U12.5
N$90: C50.1 FB4.2 U12.6
N$91: C48.2 R92.1
N$95: CN1.3 CN2.3 R7.1
N$96: CN1.2 CN2.2 R6.1
N$97: CN1.1 R5.1
N$98: C6.1 U2.5
N$116: C49.1 U12.2 U12.3
N$118: CN8.2 U12.8
N$119: R93.1 U12.1
N.C2: CN3.31 JP3.31 R34.2
N.C3: CN3.33 JP3.33 R32.2
N.C4: CN3.36 JP3.36 R31.2
NEO-DATA: CN6.02 R36.2
OE: R30.1 U5.1 U6.29 U13.1
R1: CN3.8 JP3.8 RM9.P$5
R2: CN3.9 JP3.9 RM9.P$6
R3: CN3.11 JP3.11 RM9.P$7
R4: CN3.12 JP3.12 RM9.P$8
R5: CN3.13 JP3.13 RM8.P$5
RST: J1.13 R19.1 U2.1 U6.10 U7.1 U15.4
RSV-CN4-22: CN4.22
RSV-CN4-23: CN4.23
RSV-CN4-24: CN4.24
RSV-CN4-25: CN4.25
RSV-CN6-12: CN6.12
RSV-CN6-13: CN6.13
RXD8: RM1.P$1 U5.18 U6.46
RXD9: R22.2 R24.2 RM1.P$3 U6.54
RXD9-2: R24.1 U15.23
SCI0_RXD: CN4.16 R1.1 R8.1
SCI0_TXD: CN4.14 R2.1 U5.14
SCI1_RXD: CN4.17 R3.1 R9.1
SCI1_RXD1: C3.1 D2.3 R9.2 R11.2 U5.3
SCI1_RXD2: C2.1 D1.3 R8.2 R10.2 U5.2
SCI1_TXD: CN4.15 R4.1 U5.13
SCL0: RM5.P$2 U6.34 U9.6
SCL1: RM4.P$2 U6.27 U7.7
SDA0: RM5.P$1 U6.33 U9.5
SDA1: RM4.P$1 U6.28 U7.5
SPEED: CN6.11 R117.1
SW: D24.A L3.P$2 PS3.1
TCK: J1.1 R28.2 U6.21
TDO: J1.5 RM3.P$3 U6.22
TMS: J1.9 RM3.P$2 U6.19
TRST: J1.3 U6.16
TSI: J1.11 RM3.P$1 U6.20
TXD8: R21.2 RM1.P$2 U5.6 U6.45
TXD8/UB: J1.6 R21.1
TXD9: R23.2 R25.2 RM1.P$4 U6.53
TXD9-2: R25.1 U15.22
UPSEL: R14.2 U6.15
USB0_DM: R6.2 U6.36
USB0_DP: R7.2 U6.37
USB0_OVRCURB: R27.1 U1.5 U6.26
USB0_VBUS/VBUSEN: C4.1 R5.2 R12.2 R26.2 U6.30
VBATT: D3.3 U6.6
VCC_USB: C14.1 FB1.2 U6.35
VCL: C13.2 U6.5
VREF0: C45.1 R131.2 R132.1 U6.96
XCIN: C12.2 U6.8 X2.1
XCOUT: C11.2 U6.9 X2.2
XTAL: U6.11 X1.1

## Tracks (layer width: path | path; a pad name or v marks a point on that pad's centre or on a via)
+3.3VD  (via drill 0.5 pad 1, 1 pad 1.5)
  Top 0.2: D3.2 159.45,57.25 159.7,57.5 160.28,57.5 160.73,57.95 160.73,58.87 v161.23,59.37 | SW1.3 165.45,53.95 v165.4,54 | 175.2,79.2 U6.60 | SW2.3 165.45,45.95 v165.4,46 | v88.2,63.5 C61.2 88.26,65.06 88.96,65.06 89.2,65.3 89.2,65.9 89.4,66.1 89.6,66.1 89.7,66 U13.20 | v78.2,63.5 C62.2 78.26,65.06 78.96,65.06 79.2,65.3 79.2,65.9 79.4,66.1 79.6,66.1 79.7,66 U5.20 | U7.8 228.58,91.91 C17.1 229.62,91.88 v230.5,91 | v183,50.5 183,48.77 C7.1 183.06,48.36 U3.3 | v190,50.5 190,48.77 C8.1 190.06,48.36 U4.3 | RM3.P$5 RM3.P$6 RM3.P$7 RM3.P$8 199.6,54.9 v200.4,54.1 | RM5.P$8 RM5.P$7 RM5.P$6 RM5.P$5 196.4,49.27 C16.1 | U9.8 195.5,48.1 195.9,48.5 196.68,48.5 C16.1 | C16.1 v195,49 | R19.2 176.48,51.5 176.68,51.3 177.1,51.3 177.4,51 U2.2 177.4,49.2 176.88,48.67 C1.1 174.6,49.67 173.97,50.3 v173.9,50.3 | R30.2 190.72,63.08 v191.2,62.6
  Top 0.3: FB2.1 159.03,62.5 v157.5,62.5 | 174.2,60.5 U6.14 | 175.2,79.2 175.2,80.5 176.1,81.4 v176.1,81.6 | 221.15,37.75 CN3.37 | 221.65,37.75 CN3.38 | 222.15,37.75 CN3.39 | 222.65,37.75 CN3.40
  Top 0.5: R136.2 19.1,57.3 19.5,57.7 24.7,57.7 25.6,58.6 25.6,63.4 24,65 | 22.7,79.6 23.3,79.6 PS3.4 23.35,78.85 | PS3.5 24.3,78.9
  Top 0.508: v174.2,59.3 174.2,60.5
  Top 1: L2.P$2 19,74 | L2.P$2 16,74 | L2.P$2 17.4,76.6 | L2.P$2 17.4,71.4 | 19,66.4 19,65 | 19,66.4 19,68 | 19,66.4 22.6,66.4 | L3.P$1 17.7,80.8 | L3.P$1 13.3,80.8 | L3.P$1 15.5,82 | L3.P$1 15.5,79.6 | 224.12,38.73 v224.12,39.3 223.54,38.73 | 224.12,38.73 224.12,38.2 v224.1,38.2 223.58,38.73 | 223.54,38.73 C18.1 | 223.58,38.73 224.12,38.73 | 223.58,38.73 223.54,38.73 | U15.14 256.28,30.5 244.8,30.5 U15.17 U15.18
  Route15 0.3: 232.91,27.91 233,28
  Route15 0.8: JP3.37 JP3.38 | JP3.39 JP3.40 | JP3.40 JP3.38 | JP3.37 JP3.39 | JP3.38 232.91,27.91 | JP3.40 232.87,25.37 | JP3.37 228.01,27.91 | JP3.39 228.03,25.37
  Bottom 0.2: FB3.1 162.7,59.8 162.27,59.37 v161.23,59.37 | D1.2 61.15,52.25 v60.6,52.8 | D12.2 99.65,52.25 v99.1,52.8 | D13.2 96.15,52.25 v95.6,52.8 | D14.2 92.65,52.25 v92.1,52.8 | v88.7,52.8 89.25,52.25 89.25,51.2 D15.2 | D16.2 85.65,52.25 v85.1,52.8 | D17.2 82.15,52.25 v81.6,52.8 | v78.1,52.8 78.65,52.25 D18.2 | v74.6,52.8 75.15,52.25 D19.2 | v71.1,52.8 71.65,52.25 D20.2 | D21.2 68.15,52.25 v67.6,52.8 | D2.2 64.75,52.25 v64.2,52.8 | RM1.P$8 81.3,68.2 81.7,67.8 82.1,67.8 | 82.1,67.8 82.9,67.8 | 82.9,67.8 83.7,67.8 | 83.7,67.8 v84.5,67.8 | RM1.P$7 82.1,67.8 | RM1.P$6 82.9,67.8 | RM1.P$5 83.7,67.8 | R27.2 v193.6,65.3 | v183,50.5 184,49.5 186,49.5 | 186,49.5 186.8,49.5 | 186.8,49.5 187.6,49.5 | 187.6,49.5 188.4,49.5 | 188.4,49.5 189,49.5 v190,50.5 | RM2.P$5 186,49.5 | RM2.P$6 186.8,49.5 | RM2.P$7 187.6,49.5 | RM2.P$8 188.4,49.5 | RM4.P$8 238,76.6 238.2,76.8 238.2,77.4 | 238.2,77.4 238.2,78.2 | 238.2,78.2 238.2,79 | 238.2,79 238.2,79.7 237.9,80 v237.95,80.05 | RM4.P$7 238.2,77.4 | RM4.P$6 238.2,78.2 | RM4.P$5 238.2,79
  Bottom 0.5: v174.2,59.3 174,59.5 174,61.3 174.32,61.62 174.38,61.62 | 174.38,61.62 C9.1 | v175,58.4 175.2,58.6 175.2,59.9 174.8,60.3 174.8,61.2 174.38,61.62 | v174.9,81.6 174.2,80.9 174.2,78.62 C10.1 174.9,78.83 174.9,79.3 176.1,80.5 v176.1,81.6 | FB1.1 183.38,66.95 183.93,66.4 185.3,66.4 185.8,66.9 v185.8,67.45
  other vias: 22.8,65.9 24,65.9 22.8,67.1 24,67.1 22.8,68.3 24,68.3 30.48,68.58 27.94,68.58 33.02,68.58 35.56,68.58 38.1,68.58 40.64,68.58 43.18,68.58 45.72,68.58 27.94,71.12 236.22,73.66 236.22,71.12 236.22,68.58 236.22,66.04 236.22,63.5 236.22,60.96 236.22,58.42
  pour Top (no thermals): 221.1,37.8 222.8,37.8 222.8,39.2 221.74,39.2 221.1,38.56
  pour Route15 (rank 2): 188.05,43.25 188.14,43.21 188.25,43.11 208.1,23.25 233.4,23.25 246.75,36.6 246.75,75.9 238.9,83.75 234.45,83.75 234.36,83.79 232.79,85.36 232.75,85.45 232.75,92.75 22.25,92.75 22.25,43.25
  pour Top: 18.58,68.06 18.6,68.02 18.6,64.1 24.46,64.1 24.9,64.54 24.9,78.9 22.78,78.9 22.74,78.92 22.72,78.94 22.7,78.98 22.7,80.16 19.96,82.9 10.1,82.9 10.1,78.1 20.18,78.1 20.19,78.1 20.2,78.1 20.21,78.1 20.22,78.1 20.22,78.1 20.22,78.1 20.22,78.1 20.22,78.1 20.22,78.1 20.23,78.1 20.23,78.1 20.23,78.1 20.24,78.09 20.25,78.09 20.25,78.09 20.26,78.08 20.26,78.08 20.26,78.08 20.27,78.07 20.28,78.06 20.28,78.06 22.06,76.28 22.06,76.28 22.07,76.27 22.08,76.26 22.08,76.26 22.08,76.26 22.09,76.25 22.09,76.25 22.09,76.24 22.1,76.23 22.1,76.23 22.1,76.23 22.1,76.22 22.1,76.22 22.1,76.22 22.1,76.22 22.1,76.22 22.1,76.22 22.1,76.21 22.1,76.2 22.1,76.19 22.1,76.18 22.1,68.98 22.08,68.94 22.06,68.92 22.02,68.9 21.68,68.9 21.64,68.92 21.62,68.94 21.6,68.98 21.6,75.96 20.16,77.4 15.1,77.4 15.1,68.1 18.52,68.1 18.56,68.08
+5VD  (via drill 0.5 pad 1, 1 pad 1.5)
  Top 0.2: R1.2 61.12,42.09 v61.7,41.5 | R3.2 64.62,42.09 v65.2,41.5 | R104.2 68.12,42.09 v68.7,41.5 | R103.2 71.62,42.09 v72.2,41.5 | R102.2 75.12,42.09 v75.7,41.5 | R101.2 78.62,42.09 v79.2,41.5 | R100.2 82.12,42.09 v82.7,41.5 | R99.2 85.62,42.09 v86.2,41.5 | R98.2 89.12,42.09 v89.7,41.5 | R97.2 92.62,42.09 v93.2,41.5 | R96.2 96.12,42.09 v96.7,41.5 | R95.2 99.62,42.18 v100.2,41.6 | R4.2 57.62,42.09 v58.2,41.5 | R2.2 54.12,42.09 v54.7,41.5
  Top 0.3: v145,42 145.04,42.04 FB4.1 145,47.08 R93.2
  Top 0.4: U1.2 224.56,83.36 224.88,83.67 224.88,84 | v226.5,85.2 C5.1 226.38,84 224.88,84 | 224.88,84 224.88,84.33 224.56,84.64 U1.3
  Top 0.5: R134.2 19.1,30.3 19.5,30.7 24.7,30.7 25.6,31.6 25.6,36.4 24,38
  Top 1: L1.P$2 19,47 | L1.P$2 16,47 | L1.P$2 17.4,49.6 | L1.P$2 17.4,44.4 | 19,39.4 19,38 | 19,39.4 19,41 | 19,39.4 22.6,39.4
  Bottom 0.8: v226.5,85.2 227.3,86 v235,86
  Bottom 1: CN6.03 152.5,92.5 233.5,92.5 v235,91
  other vias: 22.8,38.9 24,38.9 22.8,40.1 24,40.1 27.94,41.91 30.48,41.91 33.02,41.91 241.3,91.44 243.84,91.44 246.38,91.44 248.92,91.44
  pour Top: 18.58,41.06 18.6,41.02 18.6,37.1 24.46,37.1 24.9,37.54 24.9,50.9 15.1,50.9 15.1,41.1 18.52,41.1 18.56,41.08
  pour Route15: 186.05,40.25 186.14,40.21 186.25,40.11 206.1,20.25 259.75,20.25 259.75,92.75 233.75,92.75 233.75,85.8 234.8,84.75 239.25,84.75 239.34,84.71 247.71,76.34 247.75,76.25 247.75,36.35 247.75,36.35 247.75,36.3 247.75,36.25 247.75,36.25 247.75,36.25 247.73,36.2 247.71,36.16 247.71,36.16 247.71,36.16 247.68,36.12 247.64,36.09 247.64,36.09 233.88,22.42 233.84,22.39 233.84,22.39 233.84,22.39 233.8,22.37 233.75,22.35 233.75,22.35 233.75,22.35 233.7,22.35 207.75,22.35 207.66,22.39 187.7,42.35 22.25,42.35 22.25,38.25 24.9,38.25 26.86,40.21 26.95,40.25
+5VREF  (via drill 0.5 pad 1)
  Top 0.8: CN4.6 159,46.5 158.68,46.83 C68.1 158.68,52.52 157.95,53.25 U14.3 156.5,55.5 155.5,56.5 153.1,56.5 151.5,58.1 151.5,61.5 v151.9,61.9 152.6,61.9 153.2,62.5 R132.2
  Bottom 0.5: R43.1 142.8,27.8 143,28 145,28 | 145,28 147,28 | 147,28 149.4,28 | 149.4,28 151.6,28 | 151.6,28 153.8,28 | 153.8,28 156,28 | 156,28 158,28 159,27 CN4.6 | R42.1 145,28 | R41.1 147,27.12 147,28 | R40.1 149.4,28 | R39.1 151.6,28 | R38.1 153.8,28 | R37.1 156,28
  Bottom 0.8: v151.9,61.9 151.9,62.9 146.7,68.1 146.7,80.7 CN6.04
A/D0
  Top 0.3: R45.1 135.18,43 132.7,43 C19.1 132.7,41.5 133.2,41 151.5,41 156,36.5 CN4.5
  Bottom 0.3: CN4.5 R37.2
A/D1
  Top 0.3: R47.1 135.18,47.2 132.7,47.2 | C20.1 132.7,47.2 | 132.7,47.2 131.8,47.2 131.2,46.6 131.2,41.5 132.2,40.5 150.5,40.5 154.5,36.5 CN4.11
  Bottom 0.3: CN4.11 154.5,23.7 153.8,24.4 R38.2
A/D2
  Top 0.3: 129.21,47.21 129.22,47.2 130.1,47.2 130.7,46.6 130.7,41.2 131.9,40 149.5,40 153,36.5 CN4.4 | 129.21,47.21 C21.1 | R49.1 129.18,47.18 129.21,47.21
  Bottom 0.3: CN4.4 153,23.6 152.6,24 152,24 151.6,24.4 R39.2
A/D3
  Top 0.3: R51.1 126.74,43.02 C22.1 129.2,41.5 131.2,39.5 148.5,39.5 151.5,36.5 CN4.10
  Bottom 0.3: CN4.10 151.5,23.1 150.6,24 149.8,24 149.4,24.4 R40.2
A/D4
  Top 0.3: R53.1 112.24,42.98 C23.1 112.2,42.2 115.4,39 147.5,39 150,36.5 CN4.3
  Bottom 0.3: CN4.3 150,22.68 148.44,24.24 147.44,24.24 147.2,24.48 R41.2
A/D5
  Top 0.3: CN4.9 148.5,36.5 146.5,38.5 114.3,38.5 110.7,42.1 110.7,46.6 111.33,47.23 C24.1 114.66,47.23 R55.1
  Bottom 0.3: CN4.9 148.5,23.3 148.1,23.7 146.78,23.7 145.4,25.08 R42.2
A/D6
  Top 0.2: C25.1 108.66,47.18
  Top 0.3: CN4.2 147,36.5 145.5,38 114,38 110.2,41.8 110.2,46.6 109.58,47.23 C25.1 | 108.66,47.18 R56.1
  Bottom 0.3: CN4.2 147,22.6 145.6,24 143.88,24 R43.2
A/D7
  Top 0.3: R58.1 106.24,43.02 C26.1 108.7,42.59 113.79,37.5 144.5,37.5 145.5,36.5 CN4.8
AGND  (via drill 0.5 pad 1)
  Top 0.3: R131.1 150.7,62.5 150,61.8 v150,60 | v161,66.6 161,66.7 161.3,67 U6.94 | U14.2 v154.2,50.5 C68.2 | U6.3 168.7,60.6 167.1,59 v166.55,59 | D4.1 136.25,66.45 v136.2,66.5 | D5.1 131.25,66.45 v131.2,66.5 | D6.1 125.75,66.45 v125.7,66.5 | D7.1 120.75,66.45 v120.7,66.5 | D8.1 115.75,66.45 v115.7,66.5 | D9.1 112.05,66.5 v110.7,66.5 | D10.1 105.25,66.45 v105.2,66.5 | D11.1 99.75,66.45 v99.7,66.5 | C45.2 v155.7,62.3 | U10.11 129.7,54.5 130.07,54.88 C43.2 129.2,58.5 v128.7,58 | v108.2,58 108.7,58.5 C44.2 109.58,54.88 109.2,54.5 U11.11 | v161,62.5 161.18,62.33 C46.2 163.62,62.33 163.9,62.6 163.9,64.01 164.39,64.5 U6.99 | U12.7 145.87,55.63 v145.8,55.7 | C49.2 v147.3,61.7 | C50.2 148.88,47.12 v149,47
  Top 0.5: $4_490_$_2024-03-09_15-35-59.2 v154.2,50.5
  Route2 2: 142,46 142,24.3 CN4.1
  Bottom 0.3: C35.2 136.62,60.62 136.2,60.2 v136.2,59.5 136.2,58.8 136.58,58.42 R68.1 | R61.1 135.2,46 | 135.2,46 R60.1 | C28.2 132.7,46 | 132.7,46 C27.2 | 132.7,46 v133.95,46 135.2,46 | 126.7,46 v127.95,46 129.2,46 | R71.1 124.28,58.5 125.3,58.5 125.7,58.9 v125.7,59.5 125.7,60.2 125.28,60.62 C38.2 | R70.1 v124.2,50.37 | R69.1 v137.7,50.37 | C36.2 131.32,60.62 v130.95,61 130.57,60.62 C37.2 | C47.2 166.2,59.35 v166.55,59 | C39.2 116.12,60.62 115.7,60.2 v115.7,59.5 115.7,58.8 116.08,58.42 R72.1 | C42.2 104.78,60.62 105.2,60.2 v105.2,59.5 105.2,58.9 104.8,58.5 104.8,58.42 R75.1 | C40.2 110.83,60.62 v110.45,61 110.08,60.62 C41.2 | v103.7,50.37 R74.1 | v117.2,50.37 R73.1 | 114.7,46 R64.1 | C31.2 112.2,46 | 112.2,46 v113.45,46 114.7,46 | 106.2,46 v107.45,46 108.7,46 | R62.1 126.7,46 | C29.2 129.2,46 | 106.2,46 R67.1 | 106.2,46 R66.1 | 108.7,46 C33.2 | C34.2 108.7,46 | C30.2 129.2,46 | R63.1 126.7,46 | 112.2,46 C32.2 | 114.7,46 R65.1
  Bottom 0.8: CN6.05 144.95,79.92 v144.95,63.5
  other vias: 151.8,46.9
  pour Route2: 107.02,45.05 150.98,45.05 163.98,58.05 166.95,58.05 166.95,67.45 99.05,67.45 99.05,53.02
  pour Bottom: 150.98,45.05 163.98,58.05 166.95,58.05 166.95,67.45 99.05,67.45 99.05,53.02 107.02,45.05
AN0  (via drill 0.5 pad 1)
  Top 0.3: U6.95 162.2,66.5 161.45,65.75 160.45,65.75 159.2,67 156.2,67 155.8,67.4 140.7,67.4 139.8,66.5 D4.3 v139.8,64 139.8,63.1 139.12,62.42 R84.2
  Bottom 0.3: C35.1 139.07,62.38 139.8,63.1 v139.8,64
AN1  (via drill 0.5 pad 1)
  Top 0.3: U6.93 156.5,67.5 156.1,67.9 136.2,67.9 134.8,66.5 D5.3 v134.8,64 134.8,63.1 134.12,62.42 R85.2
  Bottom 0.3: v134.8,64 134.8,63.1 134.07,62.38 C36.1
AN2  (via drill 0.5 pad 1)
  Top 0.3: U6.92 156.8,68 156.4,68.4 130.7,68.4 129.3,67 D6.3 v129.3,64 129.3,62.52 R86.2
  Bottom 0.3: C37.1 129.3,62.48 v129.3,64
AN3  (via drill 0.5 pad 1)
  Top 0.3: U6.91 157.1,68.5 156.7,68.9 126.2,68.9 124.3,67 D7.3 v124.3,64 124.3,62.52 R87.2
  Bottom 0.3: C38.1 124.3,62.48 v124.3,64
AN4  (via drill 0.5 pad 1)
  Top 0.3: U6.90 157.4,69 157,69.4 121.7,69.4 119.3,67 D8.3 119.3,64.5 119,64.2 v119,63.5 119,62.8 118.7,62.5 117.28,62.5 R88.2
  Bottom 0.3: C39.1 118.58,62.38 119,62.8 v119,63.5
AN5  (via drill 0.5 pad 1)
  Top 0.3: U6.89 157.7,69.5 157.3,69.9 117.2,69.9 114.3,67 D9.3 v114.3,64 114.3,63.1 113.62,62.42 R89.2
  Bottom 0.3: v114.3,64 114.3,63.1 113.6,62.4 113.58,62.38 C40.1
AN6  (via drill 0.5 pad 1)
  Top 0.3: U6.88 158,70 157.6,70.4 112.2,70.4 108.8,67 D10.3 v108.8,64 108.8,62.52 R90.2
  Bottom 0.3: v108.8,64 108.8,62.48 C41.1
AN7  (via drill 0.5 pad 1)
  Top 0.3: U6.87 158.3,70.5 157.9,70.9 107.7,70.9 103.8,67 D11.3 v103.8,64 103.8,62.52 R91.2
  Bottom 0.3: v103.8,64 103.8,62.48 C42.1
AVCC0  (via drill 0.5 pad 1)
  Top 0.3: U6.97 163.1,65.5 162.7,65.1 C46.1 v161,64.08 159.4,64.08 FB2.2 | D4.2 137.6,64.5 v136.2,64.5 | D5.2 132.6,64.5 v131.2,64.5 | D6.2 127.1,64.5 v125.7,64.5 | D7.2 122.1,64.5 v120.7,64.5 | D8.2 117.1,64.5 v115.7,64.5 | D9.2 112.1,64.5 v110.7,64.5 | D10.2 105.2,64.55 v105.2,64.5 | D11.2 101.6,64.5 v99.7,64.5 98.9,64.5 98.05,63.65 D25.2 | U10.4 132.2,54.5 131.82,54.88 C43.1 132.7,58.5 v133.2,58 | v112.7,58 112.2,58.5 C44.1 111.33,54.88 111.7,54.5 U11.4
  pour Route15: 155.44,63.08 155.48,63.1 162.4,63.1 162.4,65.4 99.54,65.4 99.1,64.96 99.1,57.54 99.54,57.1 149.46,57.1 155.42,63.06
AVCC1  (via drill 0.5 pad 1)
  Top 0.3: U6.1 167.7,61 167.5,60.8 v164.4,60.8
  Bottom 0.3: v164.4,60.8 165,61.4 165,61.8 165.2,62 165.82,62 C47.1 FB3.2
B1  (via drill 0.5 pad 1)
  Top 0.2: RM7.P$8 167.7,87 172.5,91.8 204.7,91.8 212.9,83.6 212.9,44.8 214.2,43.5 v214.2,42.5 214.2,39 214.65,38.55 CN3.24
  Bottom 0.2: v214.2,42.5 214.2,43.5 217.9,47.2 226.4,47.2 226.7,46.9 230.56,46.9 JP3.24
B2  (via drill 0.5 pad 1)
  Top 0.2: RM6.P$5 166.6,87 171.8,92.2 204.9,92.2 213.3,83.8 213.3,45.2 215,43.5 v215,41.4 215,39 215.15,38.85 CN3.25
  Bottom 0.2: v215,41.4 215,43.5 218.3,46.8 226.2,46.8 228.1,44.9 228.1,44.2 229.15,43.15 JP3.25
B3  (via drill 0.5 pad 1)
  Top 0.2: RM6.P$6 165.8,87 171.4,92.6 205.1,92.6 213.7,84 213.7,45.6 215.8,43.5 v215.8,42.5 215.8,39 216.15,38.65 CN3.27
  Bottom 0.2: v215.8,42.5 215.8,43.5 218.7,46.4 226,46.4 227.7,44.7 227.7,42.14 JP3.27
B4  (via drill 0.5 pad 1)
  Top 0.2: RM6.P$7 165,87 171,93 205.3,93 214.1,84.2 214.1,46 216.6,43.5 v216.6,41.4 216.6,39 216.65,38.95 CN3.28
  Bottom 0.2: v216.6,41.4 216.6,43.5 219.1,46 225.8,46 227.3,44.5 227.3,40.9 228.8,39.4 230.56,39.4 JP3.28
B5  (via drill 0.5 pad 1)
  Top 0.2: RM6.P$8 164.2,87 170.6,93.4 205.5,93.4 214.5,84.4 214.5,46.4 217.4,43.5 v217.4,42.5 217.4,41.73 217.4,39 217.15,38.75 CN3.29
  Bottom 0.2: JP3.29 226.9,40.4 226.9,44.3 225.6,45.6 219.5,45.6 217.4,43.5 v217.4,42.5
BELTS  (via drill 0.5 pad 1)
  Top 0.3: R52.1 119.28,42.98 v119.9,43.6
  Bottom 0.2: v119.9,43.6 119.9,41.9 115.1,37.1 109.8,37.1 108.3,38.6 81.9,38.6 81,39.5 R111.1
  Bottom 0.3: v119.9,43.6 120.5,44.2 120.5,60.8 122.1,62.4 122.1,79.1 126,83 127.75,83 CN6.09
BREAK  (via drill 0.5 pad 1)
  Top 0.3: R48.1 124.2,46.28 124.44,46.03 v125.4,46
  Bottom 0.2: 121.5,46 121.5,44.83 122.3,44.03 122.3,42.1 116.5,36.3 109.4,36.3 107.9,37.8 75.7,37.8 74,39.5 R115.1
  Bottom 0.3: v125.4,46 121.5,46 121.5,60.2 123.1,61.8 123.1,78.1 126,81 130.84,81 CN6.07
CAN0-H  (via drill 0.5 pad 1)
  Top 0.2: NF1.2 v185.3,27.9
  Route15 0.2: CN4.13 160.55,18.8 162,20.25 171.35,20.25 177.8,26.7 183.5,26.7 183.9,27.1 183.9,27.5 184.3,27.9 v185.3,27.9
CAN0-L  (via drill 0.5 pad 1)
  Top 0.2: v182.1,27.9 NF1.1
  Route15 0.2: CN4.7 162,20.95 162.2,20.75 171.25,20.75 177.6,27.1 183.3,27.1 183.5,27.3 183.5,27.5 183.1,27.9 v182.1,27.9
CAN1-H  (via drill 0.5 pad 1)
  Top 0.2: v192.3,27.9 NF2.2
  Route15 0.2: CN4.26 162,12.55 162.2,12.75 169.15,12.75 171.9,15.5 171.9,18.3 179.5,25.9 189.7,25.9 190.9,27.1 190.9,27.5 191.3,27.9 v192.3,27.9
CAN1-L  (via drill 0.5 pad 1)
  Top 0.2: NF2.1 v189.1,27.9
  Route15 0.2: CN4.19 160.5,14.75 162,13.25 169,13.25 171.5,15.75 171.5,18.5 179.3,26.3 189.5,26.3 190.5,27.3 190.5,27.5 190.1,27.9 v189.1,27.9
CHARGE  (via drill 0.5 pad 1)
  Top 0.3: R46.1 137.7,46.18 137.52,46 v136.6,46
  Bottom 0.2: R119.1 67,39.5 69.5,37 107.57,37 109.07,35.5 118,35.5 124.5,42 140,42 140.7,42.7 140.7,46
  Bottom 0.3: v136.6,46 140.7,46 140.7,81.62 CN6.06
CHECK_HEAT  (via drill 0.5 pad 1)
  Top 0.3: R50.1 122.22,42.98 121.6,43.6 v121.5,43.6